# EAGLE board STC31 Breakout-Panel (EAGLE 9.6.2), part 1 of 4
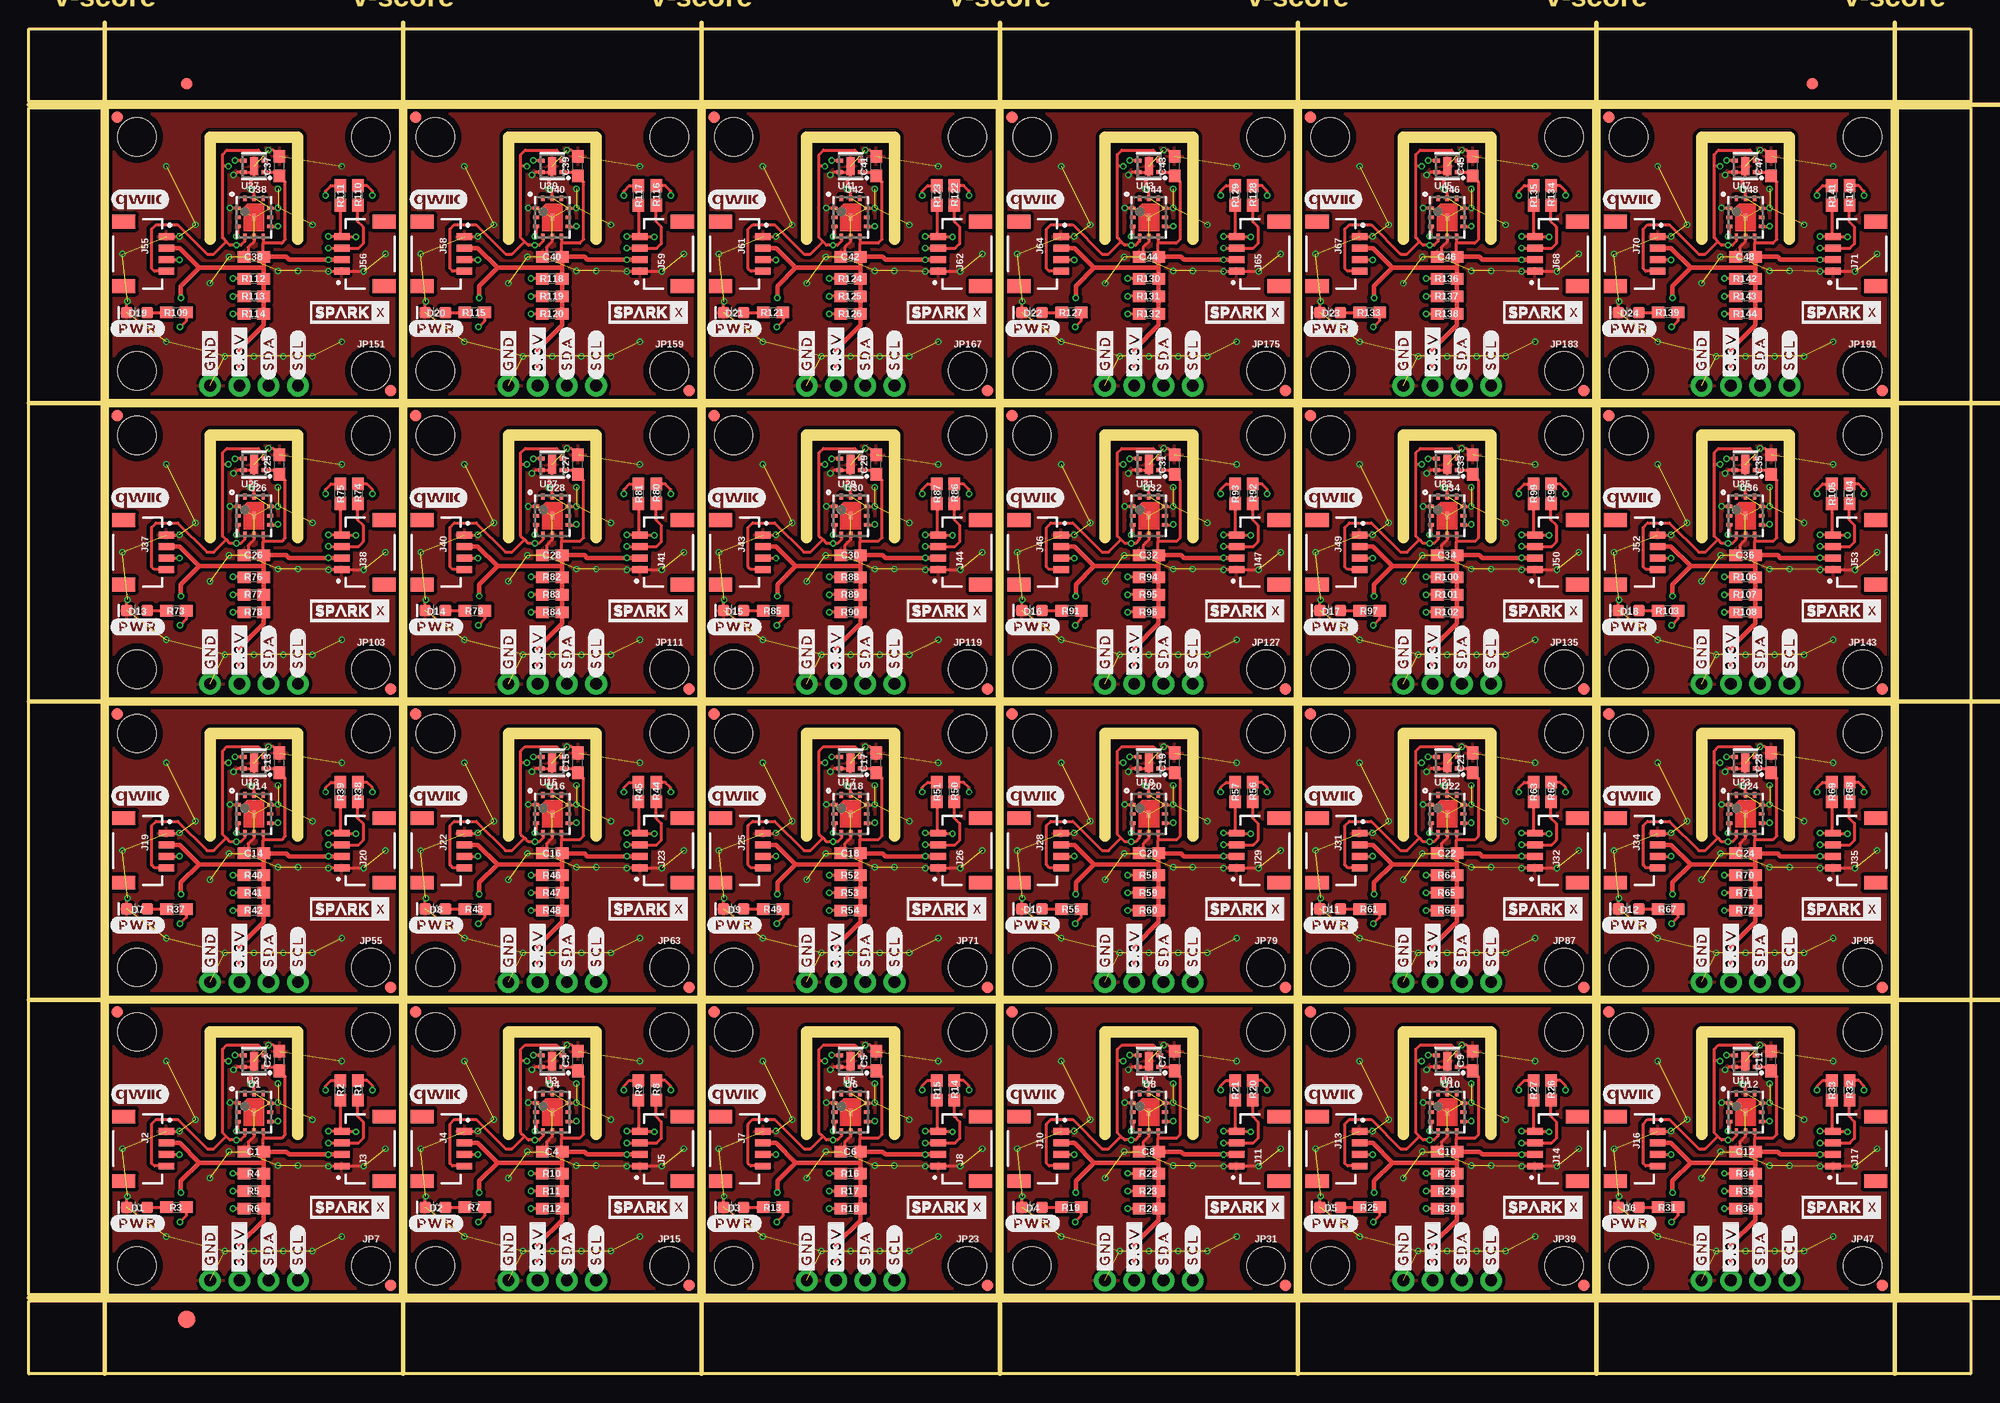
[diagram p0: board, top side]
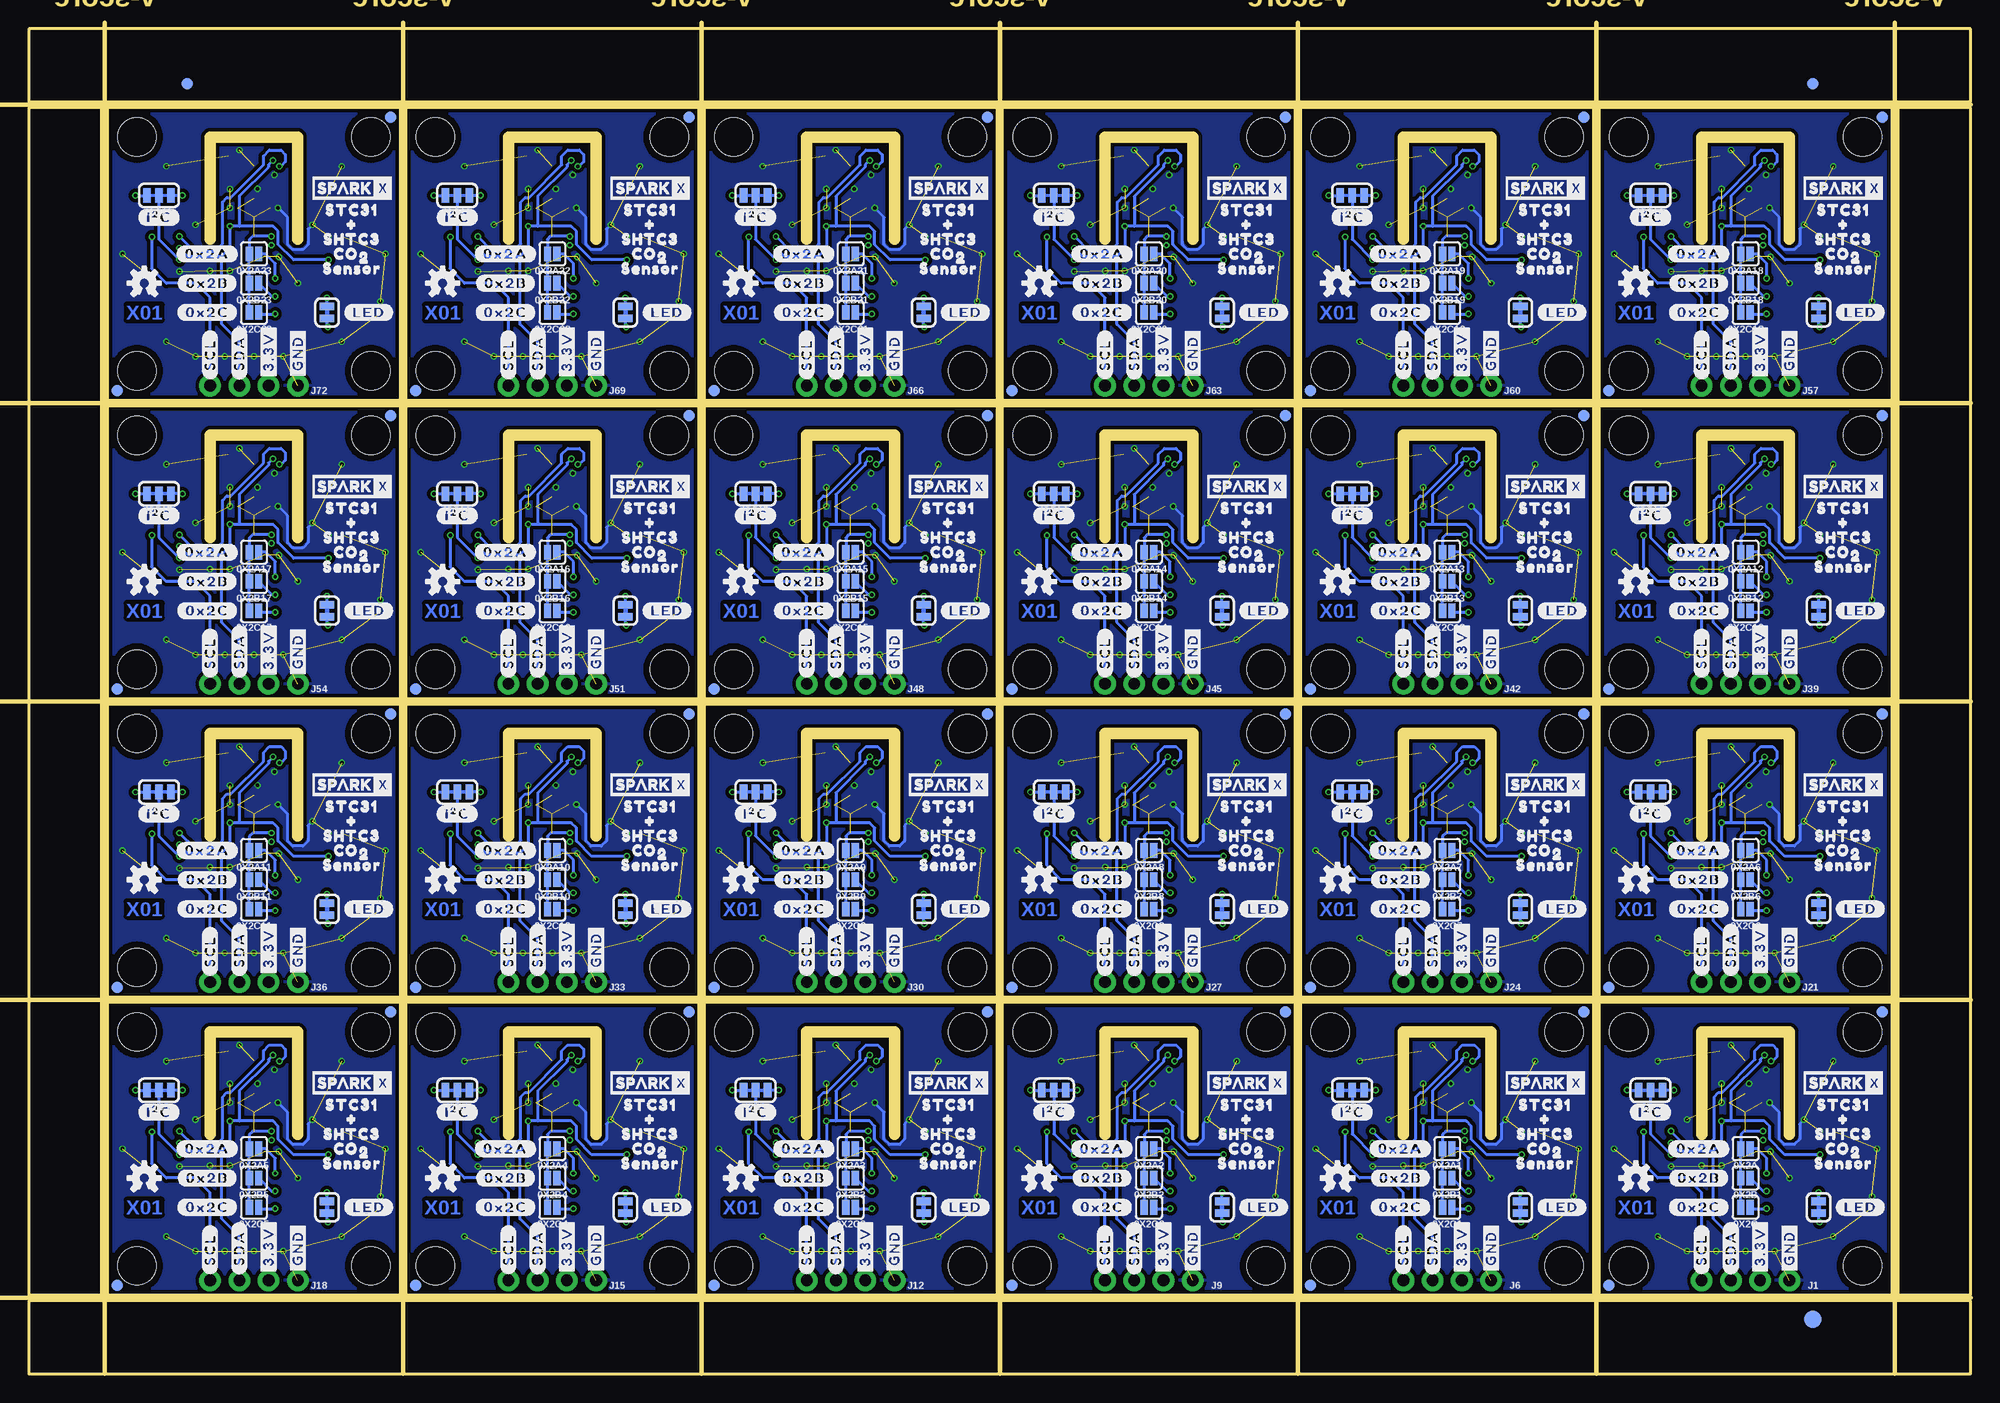
[diagram p1: board, bottom side, seen from below]

Size 168.66 x 116.84 mm. Coordinates in mm from the lower left corner, seen from the top.
Outline: 6.86,6.86 6.86,32.26 32.26,32.26 32.26,6.86 6.86,6.86
Outline: 32.77,6.86 32.77,32.26 58.17,32.26 58.17,6.86 32.77,6.86
Outline: 58.67,6.86 58.67,32.26 84.07,32.26 84.07,6.86 58.67,6.86
Outline: 84.58,6.86 84.58,32.26 109.98,32.26 109.98,6.86 84.58,6.86
Outline: 110.49,6.86 110.49,32.26 135.89,32.26 135.89,6.86 110.49,6.86
Outline: 136.4,6.86 136.4,32.26 161.8,32.26 161.8,6.86 136.4,6.86
Outline: 6.86,32.77 6.86,58.17 32.26,58.17 32.26,32.77 6.86,32.77
Outline: 32.77,32.77 32.77,58.17 58.17,58.17 58.17,32.77 32.77,32.77
Outline: 58.67,32.77 58.67,58.17 84.07,58.17 84.07,32.77 58.67,32.77
Outline: 84.58,32.77 84.58,58.17 109.98,58.17 109.98,32.77 84.58,32.77
Outline: 110.49,32.77 110.49,58.17 135.89,58.17 135.89,32.77 110.49,32.77
Outline: 136.4,32.77 136.4,58.17 161.8,58.17 161.8,32.77 136.4,32.77
Outline: 6.86,58.67 6.86,84.07 32.26,84.07 32.26,58.67 6.86,58.67
Outline: 32.77,58.67 32.77,84.07 58.17,84.07 58.17,58.67 32.77,58.67
Outline: 58.67,58.67 58.67,84.07 84.07,84.07 84.07,58.67 58.67,58.67
Outline: 84.58,58.67 84.58,84.07 109.98,84.07 109.98,58.67 84.58,58.67
Outline: 110.49,58.67 110.49,84.07 135.89,84.07 135.89,58.67 110.49,58.67
Outline: 136.4,58.67 136.4,84.07 161.8,84.07 161.8,58.67 136.4,58.67
Outline: 6.86,84.58 6.86,109.98 32.26,109.98 32.26,84.58 6.86,84.58
Outline: 32.77,84.58 32.77,109.98 58.17,109.98 58.17,84.58 32.77,84.58
Outline: 58.67,84.58 58.67,109.98 84.07,109.98 84.07,84.58 58.67,84.58
Outline: 84.58,84.58 84.58,109.98 109.98,109.98 109.98,84.58 84.58,84.58
Outline: 110.49,84.58 110.49,109.98 135.89,109.98 135.89,84.58 110.49,84.58
Outline: 136.4,84.58 136.4,109.98 161.8,109.98 161.8,84.58 136.4,84.58
Outline: 0,6.35 168.66,6.35 168.66,0 0,0 0,6.35
Outline: 162.31,109.98 168.66,109.98 168.66,6.86 162.31,6.86 162.31,109.98
Outline: 0,116.84 168.66,116.84 168.66,110.49 0,110.49 0,116.84
Outline: 0,109.98 6.35,109.98 6.35,6.86 0,6.86 0,109.98
Copper layers (1*16): Top 0.035mm / dielectric 1.5mm / Bottom 0.035mm
Design rules "STC31 Breakout": minimum track width 5mil, minimum drill 0.3mm, track to track 5mil, track to pad 5mil, pad to pad 5mil, via to via 5mil, smd to smd 5mil, copper to edge 7mil, drill to drill 7mil, minimum pad ring 5mil, minimum via ring 5mil, stop-mask expansion 2.5mil, vias tented up to drill 25mil, thermal gap 10mil
tRestrict: 72 lines
bRestrict: 72 lines
Milling: 84 lines

## Footprints (pad centres in the part's own frame; a part is rotated, then mirrored left to right if it is on the bottom)
SMT-JUMPER_2_NO_SILK = smd 0.635 x 1.27: 1 -0.406,0; 2 0.406,0
0603 = smd 1.1 x 1: 1 -0.85,0; 2 0.85,0
LED-0603 = smd 1 x 1: A -0.877,0; C 0.877,0
FIDUCIAL-1X2 = smd 1 x 1: 1 0,0
FIDUCIAL-1.5X3 = smd 1.5 x 1.5: 1 0,0
SMT-JUMPER_3_2-NC_TRACE_SILK = smd 0.66 x 1.27: 1 -1.041,0; 2 0,0; 3 1.041,0
1X04_NO_SILK = drill 1.016 pad 1.88: 1 0,0; 2 2.54,0; 3 5.08,0; 4 7.62,0
JST04_1MM_RA = smd 0.6 x 1.35: 1 -1.5,0; 2 -0.5,0; 3 0.5,0; 4 1.5,0 | smd 1.2 x 2: NC1 2.8,-3.675; NC2 -2.8,-3.675
STAND-OFF = hole 3.302: 0,0
SMT-JUMPER_2_NC_TRACE_SILK = smd 0.66 x 1.27: 1 -0.521,0; 2 0.521,0
STC31 = smd 0.5 x 0.3: 1 -1.4,0.8; 2 -1.4,0; 3 -1.4,-0.8; 7 1.4,-0.8; 8 1.4,0; 9 1.4,0.8 | smd 0.3 x 0.5: 4 -0.8,-1.65; 5 0,-1.65; 6 0.8,-1.65; 10 0.8,1.65; 11 0,1.65; 12 -0.8,1.65 | smd 0.305 x 0.61: DIEPAD 0,0
SHTC3 = smd 0.55 x 0.35: 1 -0.925,0.5; 2 -0.925,-0.5; 3 0.925,-0.5; 4 0.925,0.5 | smd 0.7 x 1.6: 5 0,0

## Placement (x,y rotation side)
0X2A  JUMPER-SMT_2_NO_SILK  [SMT-JUMPER_2_NO_SILK]  19.56,19.56 180 bottom
0X2A1  JUMPER-SMT_2_NO_SILK  [SMT-JUMPER_2_NO_SILK]  45.47,19.56 180 bottom
0X2A2  JUMPER-SMT_2_NO_SILK  [SMT-JUMPER_2_NO_SILK]  71.37,19.56 180 bottom
0X2A3  JUMPER-SMT_2_NO_SILK  [SMT-JUMPER_2_NO_SILK]  97.28,19.56 180 bottom
0X2A4  JUMPER-SMT_2_NO_SILK  [SMT-JUMPER_2_NO_SILK]  123.19,19.56 180 bottom
0X2A5  JUMPER-SMT_2_NO_SILK  [SMT-JUMPER_2_NO_SILK]  149.1,19.56 180 bottom
0X2A6  JUMPER-SMT_2_NO_SILK  [SMT-JUMPER_2_NO_SILK]  19.56,45.47 180 bottom
0X2A7  JUMPER-SMT_2_NO_SILK  [SMT-JUMPER_2_NO_SILK]  45.47,45.47 180 bottom
0X2A8  JUMPER-SMT_2_NO_SILK  [SMT-JUMPER_2_NO_SILK]  71.37,45.47 180 bottom
0X2A9  JUMPER-SMT_2_NO_SILK  [SMT-JUMPER_2_NO_SILK]  97.28,45.47 180 bottom
0X2A10  JUMPER-SMT_2_NO_SILK  [SMT-JUMPER_2_NO_SILK]  123.19,45.47 180 bottom
0X2A11  JUMPER-SMT_2_NO_SILK  [SMT-JUMPER_2_NO_SILK]  149.1,45.47 180 bottom
0X2A12  JUMPER-SMT_2_NO_SILK  [SMT-JUMPER_2_NO_SILK]  19.56,71.37 180 bottom
0X2A13  JUMPER-SMT_2_NO_SILK  [SMT-JUMPER_2_NO_SILK]  45.47,71.37 180 bottom
0X2A14  JUMPER-SMT_2_NO_SILK  [SMT-JUMPER_2_NO_SILK]  71.37,71.37 180 bottom
0X2A15  JUMPER-SMT_2_NO_SILK  [SMT-JUMPER_2_NO_SILK]  97.28,71.37 180 bottom
0X2A16  JUMPER-SMT_2_NO_SILK  [SMT-JUMPER_2_NO_SILK]  123.19,71.37 180 bottom
0X2A17  JUMPER-SMT_2_NO_SILK  [SMT-JUMPER_2_NO_SILK]  149.1,71.37 180 bottom
0X2A18  JUMPER-SMT_2_NO_SILK  [SMT-JUMPER_2_NO_SILK]  19.56,97.28 180 bottom
0X2A19  JUMPER-SMT_2_NO_SILK  [SMT-JUMPER_2_NO_SILK]  45.47,97.28 180 bottom
0X2A20  JUMPER-SMT_2_NO_SILK  [SMT-JUMPER_2_NO_SILK]  71.37,97.28 180 bottom
0X2A21  JUMPER-SMT_2_NO_SILK  [SMT-JUMPER_2_NO_SILK]  97.28,97.28 180 bottom
0X2A22  JUMPER-SMT_2_NO_SILK  [SMT-JUMPER_2_NO_SILK]  123.19,97.28 180 bottom
0X2A23  JUMPER-SMT_2_NO_SILK  [SMT-JUMPER_2_NO_SILK]  149.1,97.28 180 bottom
0X2B  JUMPER-SMT_2_NO_SILK  [SMT-JUMPER_2_NO_SILK]  19.56,17.02 180 bottom
0X2B1  JUMPER-SMT_2_NO_SILK  [SMT-JUMPER_2_NO_SILK]  45.47,17.02 180 bottom
0X2B2  JUMPER-SMT_2_NO_SILK  [SMT-JUMPER_2_NO_SILK]  71.37,17.02 180 bottom
0X2B3  JUMPER-SMT_2_NO_SILK  [SMT-JUMPER_2_NO_SILK]  97.28,17.02 180 bottom
0X2B4  JUMPER-SMT_2_NO_SILK  [SMT-JUMPER_2_NO_SILK]  123.19,17.02 180 bottom
0X2B5  JUMPER-SMT_2_NO_SILK  [SMT-JUMPER_2_NO_SILK]  149.1,17.02 180 bottom
0X2B6  JUMPER-SMT_2_NO_SILK  [SMT-JUMPER_2_NO_SILK]  19.56,42.93 180 bottom
0X2B7  JUMPER-SMT_2_NO_SILK  [SMT-JUMPER_2_NO_SILK]  45.47,42.93 180 bottom
0X2B8  JUMPER-SMT_2_NO_SILK  [SMT-JUMPER_2_NO_SILK]  71.37,42.93 180 bottom
0X2B9  JUMPER-SMT_2_NO_SILK  [SMT-JUMPER_2_NO_SILK]  97.28,42.93 180 bottom
0X2B10  JUMPER-SMT_2_NO_SILK  [SMT-JUMPER_2_NO_SILK]  123.19,42.93 180 bottom
0X2B11  JUMPER-SMT_2_NO_SILK  [SMT-JUMPER_2_NO_SILK]  149.1,42.93 180 bottom
0X2B12  JUMPER-SMT_2_NO_SILK  [SMT-JUMPER_2_NO_SILK]  19.56,68.83 180 bottom
0X2B13  JUMPER-SMT_2_NO_SILK  [SMT-JUMPER_2_NO_SILK]  45.47,68.83 180 bottom
0X2B14  JUMPER-SMT_2_NO_SILK  [SMT-JUMPER_2_NO_SILK]  71.37,68.83 180 bottom
0X2B15  JUMPER-SMT_2_NO_SILK  [SMT-JUMPER_2_NO_SILK]  97.28,68.83 180 bottom
0X2B16  JUMPER-SMT_2_NO_SILK  [SMT-JUMPER_2_NO_SILK]  123.19,68.83 180 bottom
0X2B17  JUMPER-SMT_2_NO_SILK  [SMT-JUMPER_2_NO_SILK]  149.1,68.83 180 bottom
0X2B18  JUMPER-SMT_2_NO_SILK  [SMT-JUMPER_2_NO_SILK]  19.56,94.74 180 bottom
0X2B19  JUMPER-SMT_2_NO_SILK  [SMT-JUMPER_2_NO_SILK]  45.47,94.74 180 bottom
0X2B20  JUMPER-SMT_2_NO_SILK  [SMT-JUMPER_2_NO_SILK]  71.37,94.74 180 bottom
0X2B21  JUMPER-SMT_2_NO_SILK  [SMT-JUMPER_2_NO_SILK]  97.28,94.74 180 bottom
0X2B22  JUMPER-SMT_2_NO_SILK  [SMT-JUMPER_2_NO_SILK]  123.19,94.74 180 bottom
0X2B23  JUMPER-SMT_2_NO_SILK  [SMT-JUMPER_2_NO_SILK]  149.1,94.74 180 bottom
0X2C  JUMPER-SMT_2_NO_SILK  [SMT-JUMPER_2_NO_SILK]  19.56,14.48 180 bottom
0X2C1  JUMPER-SMT_2_NO_SILK  [SMT-JUMPER_2_NO_SILK]  45.47,14.48 180 bottom
0X2C2  JUMPER-SMT_2_NO_SILK  [SMT-JUMPER_2_NO_SILK]  71.37,14.48 180 bottom
0X2C3  JUMPER-SMT_2_NO_SILK  [SMT-JUMPER_2_NO_SILK]  97.28,14.48 180 bottom
0X2C4  JUMPER-SMT_2_NO_SILK  [SMT-JUMPER_2_NO_SILK]  123.19,14.48 180 bottom
0X2C5  JUMPER-SMT_2_NO_SILK  [SMT-JUMPER_2_NO_SILK]  149.1,14.48 180 bottom
0X2C6  JUMPER-SMT_2_NO_SILK  [SMT-JUMPER_2_NO_SILK]  19.56,40.39 180 bottom
0X2C7  JUMPER-SMT_2_NO_SILK  [SMT-JUMPER_2_NO_SILK]  45.47,40.39 180 bottom
0X2C8  JUMPER-SMT_2_NO_SILK  [SMT-JUMPER_2_NO_SILK]  71.37,40.39 180 bottom
0X2C9  JUMPER-SMT_2_NO_SILK  [SMT-JUMPER_2_NO_SILK]  97.28,40.39 180 bottom
0X2C10  JUMPER-SMT_2_NO_SILK  [SMT-JUMPER_2_NO_SILK]  123.19,40.39 180 bottom
0X2C11  JUMPER-SMT_2_NO_SILK  [SMT-JUMPER_2_NO_SILK]  149.1,40.39 180 bottom
0X2C12  JUMPER-SMT_2_NO_SILK  [SMT-JUMPER_2_NO_SILK]  19.56,66.29 180 bottom
0X2C13  JUMPER-SMT_2_NO_SILK  [SMT-JUMPER_2_NO_SILK]  45.47,66.29 180 bottom
0X2C14  JUMPER-SMT_2_NO_SILK  [SMT-JUMPER_2_NO_SILK]  71.37,66.29 180 bottom
0X2C15  JUMPER-SMT_2_NO_SILK  [SMT-JUMPER_2_NO_SILK]  97.28,66.29 180 bottom
0X2C16  JUMPER-SMT_2_NO_SILK  [SMT-JUMPER_2_NO_SILK]  123.19,66.29 180 bottom
0X2C17  JUMPER-SMT_2_NO_SILK  [SMT-JUMPER_2_NO_SILK]  149.1,66.29 180 bottom
0X2C18  JUMPER-SMT_2_NO_SILK  [SMT-JUMPER_2_NO_SILK]  19.56,92.2 180 bottom
0X2C19  JUMPER-SMT_2_NO_SILK  [SMT-JUMPER_2_NO_SILK]  45.47,92.2 180 bottom
0X2C20  JUMPER-SMT_2_NO_SILK  [SMT-JUMPER_2_NO_SILK]  71.37,92.2 180 bottom
0X2C21  JUMPER-SMT_2_NO_SILK  [SMT-JUMPER_2_NO_SILK]  97.28,92.2 180 bottom
0X2C22  JUMPER-SMT_2_NO_SILK  [SMT-JUMPER_2_NO_SILK]  123.19,92.2 180 bottom
0X2C23  JUMPER-SMT_2_NO_SILK  [SMT-JUMPER_2_NO_SILK]  149.1,92.2 180 bottom
C1  0.1uF  [0603]  19.56,19.3 180 top
C2  0.1uF  [0603]  21.78,27.18 90 top
C3  0.1uF  [0603]  47.69,27.18 90 top
C4  0.1uF  [0603]  45.47,19.3 180 top
C5  0.1uF  [0603]  73.6,27.18 90 top
C6  0.1uF  [0603]  71.37,19.3 180 top
C7  0.1uF  [0603]  99.5,27.18 90 top
C8  0.1uF  [0603]  97.28,19.3 180 top
C9  0.1uF  [0603]  125.41,27.18 90 top
C10  0.1uF  [0603]  123.19,19.3 180 top
C11  0.1uF  [0603]  151.32,27.18 90 top
C12  0.1uF  [0603]  149.1,19.3 180 top
C13  0.1uF  [0603]  21.78,53.09 90 top
C14  0.1uF  [0603]  19.56,45.21 180 top
C15  0.1uF  [0603]  47.69,53.09 90 top
C16  0.1uF  [0603]  45.47,45.21 180 top
C17  0.1uF  [0603]  73.6,53.09 90 top
C18  0.1uF  [0603]  71.37,45.21 180 top
C19  0.1uF  [0603]  99.5,53.09 90 top
C20  0.1uF  [0603]  97.28,45.21 180 top
C21  0.1uF  [0603]  125.41,53.09 90 top
C22  0.1uF  [0603]  123.19,45.21 180 top
C23  0.1uF  [0603]  151.32,53.09 90 top
C24  0.1uF  [0603]  149.1,45.21 180 top
C25  0.1uF  [0603]  21.78,78.99 90 top
C26  0.1uF  [0603]  19.56,71.12 180 top
C27  0.1uF  [0603]  47.69,78.99 90 top
C28  0.1uF  [0603]  45.47,71.12 180 top
C29  0.1uF  [0603]  73.6,78.99 90 top
C30  0.1uF  [0603]  71.37,71.12 180 top
C31  0.1uF  [0603]  99.5,78.99 90 top
C32  0.1uF  [0603]  97.28,71.12 180 top
C33  0.1uF  [0603]  125.41,78.99 90 top
C34  0.1uF  [0603]  123.19,71.12 180 top
C35  0.1uF  [0603]  151.32,78.99 90 top
C36  0.1uF  [0603]  149.1,71.12 180 top
C37  0.1uF  [0603]  21.78,104.9 90 top
C38  0.1uF  [0603]  19.56,97.03 180 top
C39  0.1uF  [0603]  47.69,104.9 90 top
C40  0.1uF  [0603]  45.47,97.03 180 top
C41  0.1uF  [0603]  73.6,104.9 90 top
C42  0.1uF  [0603]  71.37,97.03 180 top
C43  0.1uF  [0603]  99.5,104.9 90 top
C44  0.1uF  [0603]  97.28,97.03 180 top
C45  0.1uF  [0603]  125.41,104.9 90 top
C46  0.1uF  [0603]  123.19,97.03 180 top
C47  0.1uF  [0603]  151.32,104.9 90 top
C48  0.1uF  [0603]  149.1,97.03 180 top
D1  RED  [LED-0603]  9.4,14.48 180 top
D2  RED  [LED-0603]  35.31,14.48 180 top
D3  RED  [LED-0603]  61.21,14.48 180 top
D4  RED  [LED-0603]  87.12,14.48 180 top
D5  RED  [LED-0603]  113.03,14.48 180 top
D6  RED  [LED-0603]  138.94,14.48 180 top
D7  RED  [LED-0603]  9.4,40.39 180 top
D8  RED  [LED-0603]  35.31,40.39 180 top
D9  RED  [LED-0603]  61.21,40.39 180 top
D10  RED  [LED-0603]  87.12,40.39 180 top
D11  RED  [LED-0603]  113.03,40.39 180 top
D12  RED  [LED-0603]  138.94,40.39 180 top
D13  RED  [LED-0603]  9.4,66.29 180 top
D14  RED  [LED-0603]  35.31,66.29 180 top
D15  RED  [LED-0603]  61.21,66.29 180 top
D16  RED  [LED-0603]  87.12,66.29 180 top
D17  RED  [LED-0603]  113.03,66.29 180 top
D18  RED  [LED-0603]  138.94,66.29 180 top
D19  RED  [LED-0603]  9.4,92.2 180 top
D20  RED  [LED-0603]  35.31,92.2 180 top
D21  RED  [LED-0603]  61.21,92.2 180 top
D22  RED  [LED-0603]  87.12,92.2 180 top
D23  RED  [LED-0603]  113.03,92.2 180 top
D24  RED  [LED-0603]  138.94,92.2 180 top
E$1  [FIDUCIAL-1X2]  13.72,112.08 0 top
E$2  [FIDUCIAL-1X2]  13.72,112.08 0 bottom
E$3  [FIDUCIAL-1X2]  154.88,112.08 0 top
E$4  [FIDUCIAL-1X2]  154.88,112.08 0 bottom
E$5  [FIDUCIAL-1.5X3]  13.72,4.76 0 top
E$6  [FIDUCIAL-1.5X3]  13.72,4.76 0 bottom
I2C  JUMPER-SMT_3_2-NC_TRACE_SILK  [SMT-JUMPER_3_2-NC_TRACE_SILK]  27.81,24.64 180 bottom
I2C1  JUMPER-SMT_3_2-NC_TRACE_SILK  [SMT-JUMPER_3_2-NC_TRACE_SILK]  53.72,24.64 180 bottom
I2C2  JUMPER-SMT_3_2-NC_TRACE_SILK  [SMT-JUMPER_3_2-NC_TRACE_SILK]  79.63,24.64 180 bottom
I2C3  JUMPER-SMT_3_2-NC_TRACE_SILK  [SMT-JUMPER_3_2-NC_TRACE_SILK]  105.54,24.64 180 bottom
I2C4  JUMPER-SMT_3_2-NC_TRACE_SILK  [SMT-JUMPER_3_2-NC_TRACE_SILK]  131.44,24.64 180 bottom
I2C5  JUMPER-SMT_3_2-NC_TRACE_SILK  [SMT-JUMPER_3_2-NC_TRACE_SILK]  157.35,24.64 180 bottom
I2C6  JUMPER-SMT_3_2-NC_TRACE_SILK  [SMT-JUMPER_3_2-NC_TRACE_SILK]  27.81,50.55 180 bottom
I2C7  JUMPER-SMT_3_2-NC_TRACE_SILK  [SMT-JUMPER_3_2-NC_TRACE_SILK]  53.72,50.55 180 bottom
I2C8  JUMPER-SMT_3_2-NC_TRACE_SILK  [SMT-JUMPER_3_2-NC_TRACE_SILK]  79.63,50.55 180 bottom
I2C9  JUMPER-SMT_3_2-NC_TRACE_SILK  [SMT-JUMPER_3_2-NC_TRACE_SILK]  105.54,50.55 180 bottom
I2C10  JUMPER-SMT_3_2-NC_TRACE_SILK  [SMT-JUMPER_3_2-NC_TRACE_SILK]  131.44,50.55 180 bottom
I2C11  JUMPER-SMT_3_2-NC_TRACE_SILK  [SMT-JUMPER_3_2-NC_TRACE_SILK]  157.35,50.55 180 bottom
I2C12  JUMPER-SMT_3_2-NC_TRACE_SILK  [SMT-JUMPER_3_2-NC_TRACE_SILK]  27.81,76.45 180 bottom
I2C13  JUMPER-SMT_3_2-NC_TRACE_SILK  [SMT-JUMPER_3_2-NC_TRACE_SILK]  53.72,76.45 180 bottom
I2C14  JUMPER-SMT_3_2-NC_TRACE_SILK  [SMT-JUMPER_3_2-NC_TRACE_SILK]  79.63,76.45 180 bottom
I2C15  JUMPER-SMT_3_2-NC_TRACE_SILK  [SMT-JUMPER_3_2-NC_TRACE_SILK]  105.54,76.45 180 bottom
I2C16  JUMPER-SMT_3_2-NC_TRACE_SILK  [SMT-JUMPER_3_2-NC_TRACE_SILK]  131.44,76.45 180 bottom
I2C17  JUMPER-SMT_3_2-NC_TRACE_SILK  [SMT-JUMPER_3_2-NC_TRACE_SILK]  157.35,76.45 180 bottom
I2C18  JUMPER-SMT_3_2-NC_TRACE_SILK  [SMT-JUMPER_3_2-NC_TRACE_SILK]  27.81,102.36 180 bottom
I2C19  JUMPER-SMT_3_2-NC_TRACE_SILK  [SMT-JUMPER_3_2-NC_TRACE_SILK]  53.72,102.36 180 bottom
I2C20  JUMPER-SMT_3_2-NC_TRACE_SILK  [SMT-JUMPER_3_2-NC_TRACE_SILK]  79.63,102.36 180 bottom
I2C21  JUMPER-SMT_3_2-NC_TRACE_SILK  [SMT-JUMPER_3_2-NC_TRACE_SILK]  105.54,102.36 180 bottom
I2C22  JUMPER-SMT_3_2-NC_TRACE_SILK  [SMT-JUMPER_3_2-NC_TRACE_SILK]  131.44,102.36 180 bottom
I2C23  JUMPER-SMT_3_2-NC_TRACE_SILK  [SMT-JUMPER_3_2-NC_TRACE_SILK]  157.35,102.36 180 bottom
J1  [1X04_NO_SILK]  15.75,8.13 180 bottom
J2  QWIIC_RIGHT_ANGLE  [JST04_1MM_RA]  11.94,19.56 270 top
J3  QWIIC_RIGHT_ANGLE  [JST04_1MM_RA]  27.18,19.56 90 top
J4  QWIIC_RIGHT_ANGLE  [JST04_1MM_RA]  37.85,19.56 270 top
J5  QWIIC_RIGHT_ANGLE  [JST04_1MM_RA]  53.09,19.56 90 top
J6  [1X04_NO_SILK]  41.66,8.13 180 bottom
J7  QWIIC_RIGHT_ANGLE  [JST04_1MM_RA]  63.75,19.56 270 top
J8  QWIIC_RIGHT_ANGLE  [JST04_1MM_RA]  78.99,19.56 90 top
J9  [1X04_NO_SILK]  67.56,8.13 180 bottom
J10  QWIIC_RIGHT_ANGLE  [JST04_1MM_RA]  89.66,19.56 270 top
J11  QWIIC_RIGHT_ANGLE  [JST04_1MM_RA]  104.9,19.56 90 top
J12  [1X04_NO_SILK]  93.47,8.13 180 bottom
J13  QWIIC_RIGHT_ANGLE  [JST04_1MM_RA]  115.57,19.56 270 top
J14  QWIIC_RIGHT_ANGLE  [JST04_1MM_RA]  130.81,19.56 90 top
J15  [1X04_NO_SILK]  119.38,8.13 180 bottom
J16  QWIIC_RIGHT_ANGLE  [JST04_1MM_RA]  141.48,19.56 270 top
J17  QWIIC_RIGHT_ANGLE  [JST04_1MM_RA]  156.72,19.56 90 top
J18  [1X04_NO_SILK]  145.29,8.13 180 bottom
J19  QWIIC_RIGHT_ANGLE  [JST04_1MM_RA]  11.94,45.47 270 top
J20  QWIIC_RIGHT_ANGLE  [JST04_1MM_RA]  27.18,45.47 90 top
J21  [1X04_NO_SILK]  15.75,34.04 180 bottom
J22  QWIIC_RIGHT_ANGLE  [JST04_1MM_RA]  37.85,45.47 270 top
J23  QWIIC_RIGHT_ANGLE  [JST04_1MM_RA]  53.09,45.47 90 top
J24  [1X04_NO_SILK]  41.66,34.04 180 bottom
J25  QWIIC_RIGHT_ANGLE  [JST04_1MM_RA]  63.75,45.47 270 top
J26  QWIIC_RIGHT_ANGLE  [JST04_1MM_RA]  78.99,45.47 90 top
J27  [1X04_NO_SILK]  67.56,34.04 180 bottom
J28  QWIIC_RIGHT_ANGLE  [JST04_1MM_RA]  89.66,45.47 270 top
J29  QWIIC_RIGHT_ANGLE  [JST04_1MM_RA]  104.9,45.47 90 top
J30  [1X04_NO_SILK]  93.47,34.04 180 bottom
J31  QWIIC_RIGHT_ANGLE  [JST04_1MM_RA]  115.57,45.47 270 top
J32  QWIIC_RIGHT_ANGLE  [JST04_1MM_RA]  130.81,45.47 90 top
J33  [1X04_NO_SILK]  119.38,34.04 180 bottom
J34  QWIIC_RIGHT_ANGLE  [JST04_1MM_RA]  141.48,45.47 270 top
J35  QWIIC_RIGHT_ANGLE  [JST04_1MM_RA]  156.72,45.47 90 top
J36  [1X04_NO_SILK]  145.29,34.04 180 bottom
J37  QWIIC_RIGHT_ANGLE  [JST04_1MM_RA]  11.94,71.37 270 top
J38  QWIIC_RIGHT_ANGLE  [JST04_1MM_RA]  27.18,71.37 90 top
J39  [1X04_NO_SILK]  15.75,59.94 180 bottom
J40  QWIIC_RIGHT_ANGLE  [JST04_1MM_RA]  37.85,71.37 270 top
J41  QWIIC_RIGHT_ANGLE  [JST04_1MM_RA]  53.09,71.37 90 top
J42  [1X04_NO_SILK]  41.66,59.94 180 bottom
J43  QWIIC_RIGHT_ANGLE  [JST04_1MM_RA]  63.75,71.37 270 top
J44  QWIIC_RIGHT_ANGLE  [JST04_1MM_RA]  78.99,71.37 90 top
J45  [1X04_NO_SILK]  67.56,59.94 180 bottom
J46  QWIIC_RIGHT_ANGLE  [JST04_1MM_RA]  89.66,71.37 270 top
J47  QWIIC_RIGHT_ANGLE  [JST04_1MM_RA]  104.9,71.37 90 top
J48  [1X04_NO_SILK]  93.47,59.94 180 bottom
J49  QWIIC_RIGHT_ANGLE  [JST04_1MM_RA]  115.57,71.37 270 top
J50  QWIIC_RIGHT_ANGLE  [JST04_1MM_RA]  130.81,71.37 90 top
J51  [1X04_NO_SILK]  119.38,59.94 180 bottom
J52  QWIIC_RIGHT_ANGLE  [JST04_1MM_RA]  141.48,71.37 270 top
J53  QWIIC_RIGHT_ANGLE  [JST04_1MM_RA]  156.72,71.37 90 top
J54  [1X04_NO_SILK]  145.29,59.94 180 bottom
J55  QWIIC_RIGHT_ANGLE  [JST04_1MM_RA]  11.94,97.28 270 top
J56  QWIIC_RIGHT_ANGLE  [JST04_1MM_RA]  27.18,97.28 90 top
J57  [1X04_NO_SILK]  15.75,85.85 180 bottom
J58  QWIIC_RIGHT_ANGLE  [JST04_1MM_RA]  37.85,97.28 270 top
J59  QWIIC_RIGHT_ANGLE  [JST04_1MM_RA]  53.09,97.28 90 top
J60  [1X04_NO_SILK]  41.66,85.85 180 bottom
J61  QWIIC_RIGHT_ANGLE  [JST04_1MM_RA]  63.75,97.28 270 top
J62  QWIIC_RIGHT_ANGLE  [JST04_1MM_RA]  78.99,97.28 90 top
J63  [1X04_NO_SILK]  67.56,85.85 180 bottom
J64  QWIIC_RIGHT_ANGLE  [JST04_1MM_RA]  89.66,97.28 270 top
J65  QWIIC_RIGHT_ANGLE  [JST04_1MM_RA]  104.9,97.28 90 top
J66  [1X04_NO_SILK]  93.47,85.85 180 bottom
J67  QWIIC_RIGHT_ANGLE  [JST04_1MM_RA]  115.57,97.28 270 top
J68  QWIIC_RIGHT_ANGLE  [JST04_1MM_RA]  130.81,97.28 90 top
J69  [1X04_NO_SILK]  119.38,85.85 180 bottom
J70  QWIIC_RIGHT_ANGLE  [JST04_1MM_RA]  141.48,97.28 270 top
J71  QWIIC_RIGHT_ANGLE  [JST04_1MM_RA]  156.72,97.28 90 top
J72  [1X04_NO_SILK]  145.29,85.85 180 bottom
JP1  FIDUCIAL1X2  [FIDUCIAL-1X2]  7.68,31.43 0 bottom
JP2  FIDUCIAL1X2  [FIDUCIAL-1X2]  31.43,7.68 0 top
JP3  STAND-OFF  [STAND-OFF]  9.4,29.72 0 top
JP4  STAND-OFF  [STAND-OFF]  29.72,29.72 0 top
JP5  FIDUCIAL1X2  [FIDUCIAL-1X2]  31.43,7.68 0 bottom
JP6  FIDUCIAL1X2  [FIDUCIAL-1X2]  7.68,31.43 0 top
JP7  STAND-OFF  [STAND-OFF]  29.72,9.4 0 top
JP8  STAND-OFF  [STAND-OFF]  9.4,9.4 0 top
JP9  STAND-OFF  [STAND-OFF]  35.31,29.72 0 top
JP10  STAND-OFF  [STAND-OFF]  55.63,29.72 0 top
JP11  FIDUCIAL1X2  [FIDUCIAL-1X2]  57.34,7.68 0 top
JP12  FIDUCIAL1X2  [FIDUCIAL-1X2]  33.59,31.43 0 top
JP13  FIDUCIAL1X2  [FIDUCIAL-1X2]  33.59,31.43 0 bottom
JP14  FIDUCIAL1X2  [FIDUCIAL-1X2]  57.34,7.68 0 bottom
JP15  STAND-OFF  [STAND-OFF]  55.63,9.4 0 top
JP16  STAND-OFF  [STAND-OFF]  35.31,9.4 0 top
JP17  STAND-OFF  [STAND-OFF]  61.21,29.72 0 top
JP18  STAND-OFF  [STAND-OFF]  81.53,29.72 0 top
JP19  FIDUCIAL1X2  [FIDUCIAL-1X2]  83.25,7.68 0 top
JP20  FIDUCIAL1X2  [FIDUCIAL-1X2]  59.5,31.43 0 top
JP21  FIDUCIAL1X2  [FIDUCIAL-1X2]  59.5,31.43 0 bottom
JP22  FIDUCIAL1X2  [FIDUCIAL-1X2]  83.25,7.68 0 bottom
JP23  STAND-OFF  [STAND-OFF]  81.53,9.4 0 top
JP24  STAND-OFF  [STAND-OFF]  61.21,9.4 0 top
JP25  STAND-OFF  [STAND-OFF]  87.12,29.72 0 top
JP26  STAND-OFF  [STAND-OFF]  107.44,29.72 0 top
JP27  FIDUCIAL1X2  [FIDUCIAL-1X2]  109.16,7.68 0 top
JP28  FIDUCIAL1X2  [FIDUCIAL-1X2]  85.41,31.43 0 top
JP29  FIDUCIAL1X2  [FIDUCIAL-1X2]  85.41,31.43 0 bottom
JP30  FIDUCIAL1X2  [FIDUCIAL-1X2]  109.16,7.68 0 bottom
JP31  STAND-OFF  [STAND-OFF]  107.44,9.4 0 top
JP32  STAND-OFF  [STAND-OFF]  87.12,9.4 0 top
JP33  STAND-OFF  [STAND-OFF]  113.03,29.72 0 top
JP34  STAND-OFF  [STAND-OFF]  133.35,29.72 0 top
JP35  FIDUCIAL1X2  [FIDUCIAL-1X2]  135.06,7.68 0 top
JP36  FIDUCIAL1X2  [FIDUCIAL-1X2]  111.32,31.43 0 top
JP37  FIDUCIAL1X2  [FIDUCIAL-1X2]  111.32,31.43 0 bottom
JP38  FIDUCIAL1X2  [FIDUCIAL-1X2]  135.06,7.68 0 bottom
JP39  STAND-OFF  [STAND-OFF]  133.35,9.4 0 top
JP40  STAND-OFF  [STAND-OFF]  113.03,9.4 0 top
JP41  STAND-OFF  [STAND-OFF]  138.94,29.72 0 top
JP42  STAND-OFF  [STAND-OFF]  159.26,29.72 0 top
JP43  FIDUCIAL1X2  [FIDUCIAL-1X2]  160.97,7.68 0 top
JP44  FIDUCIAL1X2  [FIDUCIAL-1X2]  137.22,31.43 0 top
JP45  FIDUCIAL1X2  [FIDUCIAL-1X2]  137.22,31.43 0 bottom
JP46  FIDUCIAL1X2  [FIDUCIAL-1X2]  160.97,7.68 0 bottom
JP47  STAND-OFF  [STAND-OFF]  159.26,9.4 0 top
JP48  STAND-OFF  [STAND-OFF]  138.94,9.4 0 top
JP49  STAND-OFF  [STAND-OFF]  9.4,55.63 0 top
JP50  STAND-OFF  [STAND-OFF]  29.72,55.63 0 top
JP51  FIDUCIAL1X2  [FIDUCIAL-1X2]  31.43,33.59 0 top
JP52  FIDUCIAL1X2  [FIDUCIAL-1X2]  7.68,57.34 0 top
JP53  FIDUCIAL1X2  [FIDUCIAL-1X2]  7.68,57.34 0 bottom
JP54  FIDUCIAL1X2  [FIDUCIAL-1X2]  31.43,33.59 0 bottom
JP55  STAND-OFF  [STAND-OFF]  29.72,35.31 0 top
JP56  STAND-OFF  [STAND-OFF]  9.4,35.31 0 top
JP57  STAND-OFF  [STAND-OFF]  35.31,55.63 0 top
JP58  STAND-OFF  [STAND-OFF]  55.63,55.63 0 top
JP59  FIDUCIAL1X2  [FIDUCIAL-1X2]  57.34,33.59 0 top
JP60  FIDUCIAL1X2  [FIDUCIAL-1X2]  33.59,57.34 0 top
JP61  FIDUCIAL1X2  [FIDUCIAL-1X2]  33.59,57.34 0 bottom
JP62  FIDUCIAL1X2  [FIDUCIAL-1X2]  57.34,33.59 0 bottom
JP63  STAND-OFF  [STAND-OFF]  55.63,35.31 0 top
JP64  STAND-OFF  [STAND-OFF]  35.31,35.31 0 top
JP65  STAND-OFF  [STAND-OFF]  61.21,55.63 0 top
JP66  STAND-OFF  [STAND-OFF]  81.53,55.63 0 top
JP67  FIDUCIAL1X2  [FIDUCIAL-1X2]  83.25,33.59 0 top
JP68  FIDUCIAL1X2  [FIDUCIAL-1X2]  59.5,57.34 0 top
JP69  FIDUCIAL1X2  [FIDUCIAL-1X2]  59.5,57.34 0 bottom
JP70  FIDUCIAL1X2  [FIDUCIAL-1X2]  83.25,33.59 0 bottom
JP71  STAND-OFF  [STAND-OFF]  81.53,35.31 0 top
JP72  STAND-OFF  [STAND-OFF]  61.21,35.31 0 top
JP73  STAND-OFF  [STAND-OFF]  87.12,55.63 0 top
JP74  STAND-OFF  [STAND-OFF]  107.44,55.63 0 top
JP75  FIDUCIAL1X2  [FIDUCIAL-1X2]  109.16,33.59 0 top
JP76  FIDUCIAL1X2  [FIDUCIAL-1X2]  85.41,57.34 0 top
JP77  FIDUCIAL1X2  [FIDUCIAL-1X2]  85.41,57.34 0 bottom
JP78  FIDUCIAL1X2  [FIDUCIAL-1X2]  109.16,33.59 0 bottom
JP79  STAND-OFF  [STAND-OFF]  107.44,35.31 0 top
JP80  STAND-OFF  [STAND-OFF]  87.12,35.31 0 top
JP81  STAND-OFF  [STAND-OFF]  113.03,55.63 0 top
JP82  STAND-OFF  [STAND-OFF]  133.35,55.63 0 top
JP83  FIDUCIAL1X2  [FIDUCIAL-1X2]  135.06,33.59 0 top
JP84  FIDUCIAL1X2  [FIDUCIAL-1X2]  111.32,57.34 0 top
JP85  FIDUCIAL1X2  [FIDUCIAL-1X2]  111.32,57.34 0 bottom
JP86  FIDUCIAL1X2  [FIDUCIAL-1X2]  135.06,33.59 0 bottom
JP87  STAND-OFF  [STAND-OFF]  133.35,35.31 0 top
JP88  STAND-OFF  [STAND-OFF]  113.03,35.31 0 top
JP89  STAND-OFF  [STAND-OFF]  138.94,55.63 0 top
JP90  STAND-OFF  [STAND-OFF]  159.26,55.63 0 top
JP91  FIDUCIAL1X2  [FIDUCIAL-1X2]  160.97,33.59 0 top
JP92  FIDUCIAL1X2  [FIDUCIAL-1X2]  137.22,57.34 0 top
JP93  FIDUCIAL1X2  [FIDUCIAL-1X2]  137.22,57.34 0 bottom
JP94  FIDUCIAL1X2  [FIDUCIAL-1X2]  160.97,33.59 0 bottom
JP95  STAND-OFF  [STAND-OFF]  159.26,35.31 0 top
JP96  STAND-OFF  [STAND-OFF]  138.94,35.31 0 top
JP97  STAND-OFF  [STAND-OFF]  9.4,81.53 0 top
JP98  STAND-OFF  [STAND-OFF]  29.72,81.53 0 top
JP99  FIDUCIAL1X2  [FIDUCIAL-1X2]  31.43,59.5 0 top
JP100  FIDUCIAL1X2  [FIDUCIAL-1X2]  7.68,83.25 0 top
JP101  FIDUCIAL1X2  [FIDUCIAL-1X2]  7.68,83.25 0 bottom
JP102  FIDUCIAL1X2  [FIDUCIAL-1X2]  31.43,59.5 0 bottom
JP103  STAND-OFF  [STAND-OFF]  29.72,61.21 0 top
JP104  STAND-OFF  [STAND-OFF]  9.4,61.21 0 top
JP105  STAND-OFF  [STAND-OFF]  35.31,81.53 0 top
JP106  STAND-OFF  [STAND-OFF]  55.63,81.53 0 top
JP107  FIDUCIAL1X2  [FIDUCIAL-1X2]  57.34,59.5 0 top
JP108  FIDUCIAL1X2  [FIDUCIAL-1X2]  33.59,83.25 0 top
JP109  FIDUCIAL1X2  [FIDUCIAL-1X2]  33.59,83.25 0 bottom
JP110  FIDUCIAL1X2  [FIDUCIAL-1X2]  57.34,59.5 0 bottom
JP111  STAND-OFF  [STAND-OFF]  55.63,61.21 0 top
JP112  STAND-OFF  [STAND-OFF]  35.31,61.21 0 top
JP113  STAND-OFF  [STAND-OFF]  61.21,81.53 0 top
JP114  STAND-OFF  [STAND-OFF]  81.53,81.53 0 top
JP115  FIDUCIAL1X2  [FIDUCIAL-1X2]  83.25,59.5 0 top
JP116  FIDUCIAL1X2  [FIDUCIAL-1X2]  59.5,83.25 0 top
JP117  FIDUCIAL1X2  [FIDUCIAL-1X2]  59.5,83.25 0 bottom
JP118  FIDUCIAL1X2  [FIDUCIAL-1X2]  83.25,59.5 0 bottom
JP119  STAND-OFF  [STAND-OFF]  81.53,61.21 0 top
JP120  STAND-OFF  [STAND-OFF]  61.21,61.21 0 top
JP121  STAND-OFF  [STAND-OFF]  87.12,81.53 0 top
JP122  STAND-OFF  [STAND-OFF]  107.44,81.53 0 top
JP123  FIDUCIAL1X2  [FIDUCIAL-1X2]  109.16,59.5 0 top
JP124  FIDUCIAL1X2  [FIDUCIAL-1X2]  85.41,83.25 0 top
JP125  FIDUCIAL1X2  [FIDUCIAL-1X2]  85.41,83.25 0 bottom
JP126  FIDUCIAL1X2  [FIDUCIAL-1X2]  109.16,59.5 0 bottom
JP127  STAND-OFF  [STAND-OFF]  107.44,61.21 0 top
JP128  STAND-OFF  [STAND-OFF]  87.12,61.21 0 top
JP129  STAND-OFF  [STAND-OFF]  113.03,81.53 0 top
JP130  STAND-OFF  [STAND-OFF]  133.35,81.53 0 top
JP131  FIDUCIAL1X2  [FIDUCIAL-1X2]  135.06,59.5 0 top
JP132  FIDUCIAL1X2  [FIDUCIAL-1X2]  111.32,83.25 0 top
JP133  FIDUCIAL1X2  [FIDUCIAL-1X2]  111.32,83.25 0 bottom
JP134  FIDUCIAL1X2  [FIDUCIAL-1X2]  135.06,59.5 0 bottom
JP135  STAND-OFF  [STAND-OFF]  133.35,61.21 0 top
JP136  STAND-OFF  [STAND-OFF]  113.03,61.21 0 top
JP137  STAND-OFF  [STAND-OFF]  138.94,81.53 0 top
JP138  STAND-OFF  [STAND-OFF]  159.26,81.53 0 top
JP139  FIDUCIAL1X2  [FIDUCIAL-1X2]  160.97,59.5 0 top
JP140  FIDUCIAL1X2  [FIDUCIAL-1X2]  137.22,83.25 0 top
JP141  FIDUCIAL1X2  [FIDUCIAL-1X2]  137.22,83.25 0 bottom
JP142  FIDUCIAL1X2  [FIDUCIAL-1X2]  160.97,59.5 0 bottom
JP143  STAND-OFF  [STAND-OFF]  159.26,61.21 0 top
JP144  STAND-OFF  [STAND-OFF]  138.94,61.21 0 top
JP145  STAND-OFF  [STAND-OFF]  9.4,107.44 0 top
JP146  STAND-OFF  [STAND-OFF]  29.72,107.44 0 top
JP147  FIDUCIAL1X2  [FIDUCIAL-1X2]  31.43,85.41 0 top
JP148  FIDUCIAL1X2  [FIDUCIAL-1X2]  7.68,109.16 0 top
JP149  FIDUCIAL1X2  [FIDUCIAL-1X2]  7.68,109.16 0 bottom
JP150  FIDUCIAL1X2  [FIDUCIAL-1X2]  31.43,85.41 0 bottom
JP151  STAND-OFF  [STAND-OFF]  29.72,87.12 0 top
JP152  STAND-OFF  [STAND-OFF]  9.4,87.12 0 top
JP153  STAND-OFF  [STAND-OFF]  35.31,107.44 0 top
JP154  STAND-OFF  [STAND-OFF]  55.63,107.44 0 top
JP155  FIDUCIAL1X2  [FIDUCIAL-1X2]  57.34,85.41 0 top
JP156  FIDUCIAL1X2  [FIDUCIAL-1X2]  33.59,109.16 0 top
JP157  FIDUCIAL1X2  [FIDUCIAL-1X2]  33.59,109.16 0 bottom
JP158  FIDUCIAL1X2  [FIDUCIAL-1X2]  57.34,85.41 0 bottom
JP159  STAND-OFF  [STAND-OFF]  55.63,87.12 0 top
JP160  STAND-OFF  [STAND-OFF]  35.31,87.12 0 top
JP161  STAND-OFF  [STAND-OFF]  61.21,107.44 0 top
JP162  STAND-OFF  [STAND-OFF]  81.53,107.44 0 top
JP163  FIDUCIAL1X2  [FIDUCIAL-1X2]  83.25,85.41 0 top
JP164  FIDUCIAL1X2  [FIDUCIAL-1X2]  59.5,109.16 0 top
JP165  FIDUCIAL1X2  [FIDUCIAL-1X2]  59.5,109.16 0 bottom
JP166  FIDUCIAL1X2  [FIDUCIAL-1X2]  83.25,85.41 0 bottom
JP167  STAND-OFF  [STAND-OFF]  81.53,87.12 0 top
JP168  STAND-OFF  [STAND-OFF]  61.21,87.12 0 top
JP169  STAND-OFF  [STAND-OFF]  87.12,107.44 0 top
JP170  STAND-OFF  [STAND-OFF]  107.44,107.44 0 top
JP171  FIDUCIAL1X2  [FIDUCIAL-1X2]  109.16,85.41 0 top
JP172  FIDUCIAL1X2  [FIDUCIAL-1X2]  85.41,109.16 0 top
JP173  FIDUCIAL1X2  [FIDUCIAL-1X2]  85.41,109.16 0 bottom
JP174  FIDUCIAL1X2  [FIDUCIAL-1X2]  109.16,85.41 0 bottom
JP175  STAND-OFF  [STAND-OFF]  107.44,87.12 0 top
JP176  STAND-OFF  [STAND-OFF]  87.12,87.12 0 top
JP177  STAND-OFF  [STAND-OFF]  113.03,107.44 0 top
JP178  STAND-OFF  [STAND-OFF]  133.35,107.44 0 top
JP179  FIDUCIAL1X2  [FIDUCIAL-1X2]  135.06,85.41 0 top
JP180  FIDUCIAL1X2  [FIDUCIAL-1X2]  111.32,109.16 0 top
JP181  FIDUCIAL1X2  [FIDUCIAL-1X2]  111.32,109.16 0 bottom
JP182  FIDUCIAL1X2  [FIDUCIAL-1X2]  135.06,85.41 0 bottom
JP183  STAND-OFF  [STAND-OFF]  133.35,87.12 0 top
JP184  STAND-OFF  [STAND-OFF]  113.03,87.12 0 top
JP185  STAND-OFF  [STAND-OFF]  138.94,107.44 0 top
JP186  STAND-OFF  [STAND-OFF]  159.26,107.44 0 top
JP187  FIDUCIAL1X2  [FIDUCIAL-1X2]  160.97,85.41 0 top
JP188  FIDUCIAL1X2  [FIDUCIAL-1X2]  137.22,109.16 0 top
JP189  FIDUCIAL1X2  [FIDUCIAL-1X2]  137.22,109.16 0 bottom
JP190  FIDUCIAL1X2  [FIDUCIAL-1X2]  160.97,85.41 0 bottom
JP191  STAND-OFF  [STAND-OFF]  159.26,87.12 0 top
JP192  STAND-OFF  [STAND-OFF]  138.94,87.12 0 top
LED  JUMPER-SMT_2_NC_TRACE_SILK  [SMT-JUMPER_2_NC_TRACE_SILK]  13.21,14.48 90 bottom
LED1  JUMPER-SMT_2_NC_TRACE_SILK  [SMT-JUMPER_2_NC_TRACE_SILK]  39.12,14.48 90 bottom
LED2  JUMPER-SMT_2_NC_TRACE_SILK  [SMT-JUMPER_2_NC_TRACE_SILK]  65.02,14.48 90 bottom
LED3  JUMPER-SMT_2_NC_TRACE_SILK  [SMT-JUMPER_2_NC_TRACE_SILK]  90.93,14.48 90 bottom
LED4  JUMPER-SMT_2_NC_TRACE_SILK  [SMT-JUMPER_2_NC_TRACE_SILK]  116.84,14.48 90 bottom
LED5  JUMPER-SMT_2_NC_TRACE_SILK  [SMT-JUMPER_2_NC_TRACE_SILK]  142.75,14.48 90 bottom
LED6  JUMPER-SMT_2_NC_TRACE_SILK  [SMT-JUMPER_2_NC_TRACE_SILK]  13.21,40.39 90 bottom
LED7  JUMPER-SMT_2_NC_TRACE_SILK  [SMT-JUMPER_2_NC_TRACE_SILK]  39.12,40.39 90 bottom
LED8  JUMPER-SMT_2_NC_TRACE_SILK  [SMT-JUMPER_2_NC_TRACE_SILK]  65.02,40.39 90 bottom
LED9  JUMPER-SMT_2_NC_TRACE_SILK  [SMT-JUMPER_2_NC_TRACE_SILK]  90.93,40.39 90 bottom
LED10  JUMPER-SMT_2_NC_TRACE_SILK  [SMT-JUMPER_2_NC_TRACE_SILK]  116.84,40.39 90 bottom
LED11  JUMPER-SMT_2_NC_TRACE_SILK  [SMT-JUMPER_2_NC_TRACE_SILK]  142.75,40.39 90 bottom
LED12  JUMPER-SMT_2_NC_TRACE_SILK  [SMT-JUMPER_2_NC_TRACE_SILK]  13.21,66.29 90 bottom
LED13  JUMPER-SMT_2_NC_TRACE_SILK  [SMT-JUMPER_2_NC_TRACE_SILK]  39.12,66.29 90 bottom
LED14  JUMPER-SMT_2_NC_TRACE_SILK  [SMT-JUMPER_2_NC_TRACE_SILK]  65.02,66.29 90 bottom
LED15  JUMPER-SMT_2_NC_TRACE_SILK  [SMT-JUMPER_2_NC_TRACE_SILK]  90.93,66.29 90 bottom
LED16  JUMPER-SMT_2_NC_TRACE_SILK  [SMT-JUMPER_2_NC_TRACE_SILK]  116.84,66.29 90 bottom
LED17  JUMPER-SMT_2_NC_TRACE_SILK  [SMT-JUMPER_2_NC_TRACE_SILK]  142.75,66.29 90 bottom
LED18  JUMPER-SMT_2_NC_TRACE_SILK  [SMT-JUMPER_2_NC_TRACE_SILK]  13.21,92.2 90 bottom
LED19  JUMPER-SMT_2_NC_TRACE_SILK  [SMT-JUMPER_2_NC_TRACE_SILK]  39.12,92.2 90 bottom
LED20  JUMPER-SMT_2_NC_TRACE_SILK  [SMT-JUMPER_2_NC_TRACE_SILK]  65.02,92.2 90 bottom
LED21  JUMPER-SMT_2_NC_TRACE_SILK  [SMT-JUMPER_2_NC_TRACE_SILK]  90.93,92.2 90 bottom
LED22  JUMPER-SMT_2_NC_TRACE_SILK  [SMT-JUMPER_2_NC_TRACE_SILK]  116.84,92.2 90 bottom
LED23  JUMPER-SMT_2_NC_TRACE_SILK  [SMT-JUMPER_2_NC_TRACE_SILK]  142.75,92.2 90 bottom
LOGO1  OSHW-LOGOS  [OSHW-LOGO-S]  54.99,17.02 0 bottom
LOGO2  QWIIC_LOGO_5MM  [QWIIC_5MM]  9.65,24.32 0 top
LOGO3  QWIIC_LOGO_5MM  [QWIIC_5MM]  35.56,24.32 0 top
LOGO4  OSHW-LOGOS  [OSHW-LOGO-S]  80.9,17.02 0 bottom
LOGO5  OSHW-LOGOS  [OSHW-LOGO-S]  29.08,17.02 0 bottom
LOGO6  QWIIC_LOGO_5MM  [QWIIC_5MM]  61.47,24.32 0 top
LOGO7  OSHW-LOGOS  [OSHW-LOGO-S]  106.81,17.02 0 bottom
LOGO8  QWIIC_LOGO_5MM  [QWIIC_5MM]  87.38,24.32 0 top
LOGO9  OSHW-LOGOS  [OSHW-LOGO-S]  132.72,17.02 0 bottom
LOGO10  QWIIC_LOGO_5MM  [QWIIC_5MM]  113.28,24.32 0 top
LOGO11  OSHW-LOGOS  [OSHW-LOGO-S]  158.62,17.02 0 bottom
LOGO12  QWIIC_LOGO_5MM  [QWIIC_5MM]  139.19,24.32 0 top
LOGO13  OSHW-LOGOS  [OSHW-LOGO-S]  29.08,42.93 0 bottom
LOGO14  QWIIC_LOGO_5MM  [QWIIC_5MM]  9.65,50.23 0 top
LOGO15  OSHW-LOGOS  [OSHW-LOGO-S]  54.99,42.93 0 bottom
LOGO16  QWIIC_LOGO_5MM  [QWIIC_5MM]  35.56,50.23 0 top
LOGO17  OSHW-LOGOS  [OSHW-LOGO-S]  80.9,42.93 0 bottom
LOGO18  QWIIC_LOGO_5MM  [QWIIC_5MM]  61.47,50.23 0 top
LOGO19  OSHW-LOGOS  [OSHW-LOGO-S]  106.81,42.93 0 bottom
LOGO20  QWIIC_LOGO_5MM  [QWIIC_5MM]  87.38,50.23 0 top
LOGO21  OSHW-LOGOS  [OSHW-LOGO-S]  132.72,42.93 0 bottom
LOGO22  QWIIC_LOGO_5MM  [QWIIC_5MM]  113.28,50.23 0 top
LOGO23  OSHW-LOGOS  [OSHW-LOGO-S]  158.62,42.93 0 bottom
LOGO24  QWIIC_LOGO_5MM  [QWIIC_5MM]  139.19,50.23 0 top
LOGO25  OSHW-LOGOS  [OSHW-LOGO-S]  29.08,68.83 0 bottom
LOGO26  QWIIC_LOGO_5MM  [QWIIC_5MM]  9.65,76.14 0 top
LOGO27  OSHW-LOGOS  [OSHW-LOGO-S]  54.99,68.83 0 bottom
LOGO28  QWIIC_LOGO_5MM  [QWIIC_5MM]  35.56,76.14 0 top
LOGO29  OSHW-LOGOS  [OSHW-LOGO-S]  80.9,68.83 0 bottom
LOGO30  QWIIC_LOGO_5MM  [QWIIC_5MM]  61.47,76.14 0 top
LOGO31  OSHW-LOGOS  [OSHW-LOGO-S]  106.81,68.83 0 bottom
LOGO32  QWIIC_LOGO_5MM  [QWIIC_5MM]  87.38,76.14 0 top
LOGO33  OSHW-LOGOS  [OSHW-LOGO-S]  132.72,68.83 0 bottom
LOGO34  QWIIC_LOGO_5MM  [QWIIC_5MM]  113.28,76.14 0 top
LOGO35  OSHW-LOGOS  [OSHW-LOGO-S]  158.62,68.83 0 bottom
LOGO36  QWIIC_LOGO_5MM  [QWIIC_5MM]  139.19,76.14 0 top
LOGO37  OSHW-LOGOS  [OSHW-LOGO-S]  29.08,94.74 0 bottom
LOGO38  QWIIC_LOGO_5MM  [QWIIC_5MM]  9.65,102.04 0 top
LOGO39  OSHW-LOGOS  [OSHW-LOGO-S]  54.99,94.74 0 bottom
LOGO40  QWIIC_LOGO_5MM  [QWIIC_5MM]  35.56,102.04 0 top
LOGO41  OSHW-LOGOS  [OSHW-LOGO-S]  80.9,94.74 0 bottom
LOGO42  QWIIC_LOGO_5MM  [QWIIC_5MM]  61.47,102.04 0 top
LOGO43  OSHW-LOGOS  [OSHW-LOGO-S]  106.81,94.74 0 bottom
LOGO44  QWIIC_LOGO_5MM  [QWIIC_5MM]  87.38,102.04 0 top
LOGO45  OSHW-LOGOS  [OSHW-LOGO-S]  132.72,94.74 0 bottom
LOGO46  QWIIC_LOGO_5MM  [QWIIC_5MM]  113.28,102.04 0 top
LOGO47  OSHW-LOGOS  [OSHW-LOGO-S]  158.62,94.74 0 bottom
LOGO48  QWIIC_LOGO_5MM  [QWIIC_5MM]  139.19,102.04 0 top
R1  4.7k  [0603]  28.57,24.64 90 top
R2  4.7k  [0603]  27.05,24.64 90 top
R3  1k  [0603]  12.83,14.48 0 top
R4  10k  [0603]  19.56,17.4 180 top
R5  3.3k  [0603]  19.56,15.88 180 top
R6  1k  [0603]  19.56,14.35 180 top
R7  1k  [0603]  38.73,14.48 0 top
R8  4.7k  [0603]  54.48,24.64 90 top
R9  4.7k  [0603]  52.96,24.64 90 top
R10  10k  [0603]  45.47,17.4 180 top
R11  3.3k  [0603]  45.47,15.88 180 top
R12  1k  [0603]  45.47,14.35 180 top
R13  1k  [0603]  64.64,14.48 0 top
R14  4.7k  [0603]  80.39,24.64 90 top
R15  4.7k  [0603]  78.87,24.64 90 top
R16  10k  [0603]  71.37,17.4 180 top
R17  3.3k  [0603]  71.37,15.88 180 top
R18  1k  [0603]  71.37,14.35 180 top
R19  1k  [0603]  90.55,14.48 0 top
R20  4.7k  [0603]  106.3,24.64 90 top
R21  4.7k  [0603]  104.78,24.64 90 top
R22  10k  [0603]  97.28,17.4 180 top
R23  3.3k  [0603]  97.28,15.88 180 top
R24  1k  [0603]  97.28,14.35 180 top
R25  1k  [0603]  116.46,14.48 0 top
R26  4.7k  [0603]  132.21,24.64 90 top
R27  4.7k  [0603]  130.68,24.64 90 top
R28  10k  [0603]  123.19,17.4 180 top
R29  3.3k  [0603]  123.19,15.88 180 top
R30  1k  [0603]  123.19,14.35 180 top
R31  1k  [0603]  142.37,14.48 0 top
R32  4.7k  [0603]  158.12,24.64 90 top
R33  4.7k  [0603]  156.59,24.64 90 top
R34  10k  [0603]  149.1,17.4 180 top
R35  3.3k  [0603]  149.1,15.88 180 top
R36  1k  [0603]  149.1,14.35 180 top
R37  1k  [0603]  12.83,40.39 0 top
R38  4.7k  [0603]  28.57,50.55 90 top
R39  4.7k  [0603]  27.05,50.55 90 top
R40  10k  [0603]  19.56,43.31 180 top
R41  3.3k  [0603]  19.56,41.78 180 top
R42  1k  [0603]  19.56,40.26 180 top
R43  1k  [0603]  38.73,40.39 0 top
R44  4.7k  [0603]  54.48,50.55 90 top
R45  4.7k  [0603]  52.96,50.55 90 top
R46  10k  [0603]  45.47,43.31 180 top
R47  3.3k  [0603]  45.47,41.78 180 top
R48  1k  [0603]  45.47,40.26 180 top
R49  1k  [0603]  64.64,40.39 0 top
R50  4.7k  [0603]  80.39,50.55 90 top
R51  4.7k  [0603]  78.87,50.55 90 top
R52  10k  [0603]  71.37,43.31 180 top
R53  3.3k  [0603]  71.37,41.78 180 top
R54  1k  [0603]  71.37,40.26 180 top
R55  1k  [0603]  90.55,40.39 0 top
R56  4.7k  [0603]  106.3,50.55 90 top
R57  4.7k  [0603]  104.78,50.55 90 top
R58  10k  [0603]  97.28,43.31 180 top
R59  3.3k  [0603]  97.28,41.78 180 top
R60  1k  [0603]  97.28,40.26 180 top
R61  1k  [0603]  116.46,40.39 0 top
R62  4.7k  [0603]  132.21,50.55 90 top
R63  4.7k  [0603]  130.68,50.55 90 top
R64  10k  [0603]  123.19,43.31 180 top
R65  3.3k  [0603]  123.19,41.78 180 top
R66  1k  [0603]  123.19,40.26 180 top
R67  1k  [0603]  142.37,40.39 0 top
R68  4.7k  [0603]  158.12,50.55 90 top
R69  4.7k  [0603]  156.59,50.55 90 top
R70  10k  [0603]  149.1,43.31 180 top
R71  3.3k  [0603]  149.1,41.78 180 top
R72  1k  [0603]  149.1,40.26 180 top
R73  1k  [0603]  12.83,66.29 0 top
R74  4.7k  [0603]  28.57,76.45 90 top
R75  4.7k  [0603]  27.05,76.45 90 top
R76  10k  [0603]  19.56,69.22 180 top
R77  3.3k  [0603]  19.56,67.69 180 top
R78  1k  [0603]  19.56,66.17 180 top
R79  1k  [0603]  38.73,66.29 0 top
R80  4.7k  [0603]  54.48,76.45 90 top
R81  4.7k  [0603]  52.96,76.45 90 top
R82  10k  [0603]  45.47,69.22 180 top
R83  3.3k  [0603]  45.47,67.69 180 top
R84  1k  [0603]  45.47,66.17 180 top
R85  1k  [0603]  64.64,66.29 0 top
R86  4.7k  [0603]  80.39,76.45 90 top
R87  4.7k  [0603]  78.87,76.45 90 top
R88  10k  [0603]  71.37,69.22 180 top
R89  3.3k  [0603]  71.37,67.69 180 top
R90  1k  [0603]  71.37,66.17 180 top
R91  1k  [0603]  90.55,66.29 0 top
R92  4.7k  [0603]  106.3,76.45 90 top
R93  4.7k  [0603]  104.78,76.45 90 top
R94  10k  [0603]  97.28,69.22 180 top
R95  3.3k  [0603]  97.28,67.69 180 top
R96  1k  [0603]  97.28,66.17 180 top
R97  1k  [0603]  116.46,66.29 0 top
R98  4.7k  [0603]  132.21,76.45 90 top
R99  4.7k  [0603]  130.68,76.45 90 top
R100  10k  [0603]  123.19,69.22 180 top
R101  3.3k  [0603]  123.19,67.69 180 top
R102  1k  [0603]  123.19,66.17 180 top
R103  1k  [0603]  142.37,66.29 0 top
R104  4.7k  [0603]  158.12,76.45 90 top
R105  4.7k  [0603]  156.59,76.45 90 top
R106  10k  [0603]  149.1,69.22 180 top
R107  3.3k  [0603]  149.1,67.69 180 top
R108  1k  [0603]  149.1,66.17 180 top
R109  1k  [0603]  12.83,92.2 0 top
R110  4.7k  [0603]  28.57,102.36 90 top
R111  4.7k  [0603]  27.05,102.36 90 top
R112  10k  [0603]  19.56,95.12 180 top
R113  3.3k  [0603]  19.56,93.6 180 top
R114  1k  [0603]  19.56,92.08 180 top
R115  1k  [0603]  38.73,92.2 0 top
R116  4.7k  [0603]  54.48,102.36 90 top
R117  4.7k  [0603]  52.96,102.36 90 top
R118  10k  [0603]  45.47,95.12 180 top
R119  3.3k  [0603]  45.47,93.6 180 top
R120  1k  [0603]  45.47,92.08 180 top
R121  1k  [0603]  64.64,92.2 0 top
R122  4.7k  [0603]  80.39,102.36 90 top
R123  4.7k  [0603]  78.87,102.36 90 top
R124  10k  [0603]  71.37,95.12 180 top
R125  3.3k  [0603]  71.37,93.6 180 top
R126  1k  [0603]  71.37,92.08 180 top
R127  1k  [0603]  90.55,92.2 0 top
R128  4.7k  [0603]  106.3,102.36 90 top
R129  4.7k  [0603]  104.78,102.36 90 top
R130  10k  [0603]  97.28,95.12 180 top
R131  3.3k  [0603]  97.28,93.6 180 top
R132  1k  [0603]  97.28,92.08 180 top
R133  1k  [0603]  116.46,92.2 0 top
R134  4.7k  [0603]  132.21,102.36 90 top
R135  4.7k  [0603]  130.68,102.36 90 top
R136  10k  [0603]  123.19,95.12 180 top
R137  3.3k  [0603]  123.19,93.6 180 top
R138  1k  [0603]  123.19,92.08 180 top
R139  1k  [0603]  142.37,92.2 0 top
R140  4.7k  [0603]  158.12,102.36 90 top
R141  4.7k  [0603]  156.59,102.36 90 top
R142  10k  [0603]  149.1,95.12 180 top
R143  3.3k  [0603]  149.1,93.6 180 top
R144  1k  [0603]  149.1,92.08 180 top
U1  STC31  [STC31]  19.56,22.73 0 top
U2  SHTC3  [SHTC3]  19.56,27.18 180 top
U3  SHTC3  [SHTC3]  45.47,27.18 180 top
U4  STC31  [STC31]  45.47,22.73 0 top
U5  SHTC3  [SHTC3]  71.37,27.18 180 top
U6  STC31  [STC31]  71.37,22.73 0 top
U7  SHTC3  [SHTC3]  97.28,27.18 180 top
U8  STC31  [STC31]  97.28,22.73 0 top
U9  SHTC3  [SHTC3]  123.19,27.18 180 top
U10  STC31  [STC31]  123.19,22.73 0 top
U11  SHTC3  [SHTC3]  149.1,27.18 180 top
U12  STC31  [STC31]  149.1,22.73 0 top
U13  SHTC3  [SHTC3]  19.56,53.09 180 top
U14  STC31  [STC31]  19.56,48.64 0 top
U15  SHTC3  [SHTC3]  45.47,53.09 180 top
U16  STC31  [STC31]  45.47,48.64 0 top
U17  SHTC3  [SHTC3]  71.37,53.09 180 top
U18  STC31  [STC31]  71.37,48.64 0 top
U19  SHTC3  [SHTC3]  97.28,53.09 180 top
U20  STC31  [STC31]  97.28,48.64 0 top
U21  SHTC3  [SHTC3]  123.19,53.09 180 top
U22  STC31  [STC31]  123.19,48.64 0 top
U23  SHTC3  [SHTC3]  149.1,53.09 180 top
U24  STC31  [STC31]  149.1,48.64 0 top
U25  SHTC3  [SHTC3]  19.56,78.99 180 top
U26  STC31  [STC31]  19.56,74.55 0 top
U27  SHTC3  [SHTC3]  45.47,78.99 180 top
U28  STC31  [STC31]  45.47,74.55 0 top
U29  SHTC3  [SHTC3]  71.37,78.99 180 top
U30  STC31  [STC31]  71.37,74.55 0 top
U31  SHTC3  [SHTC3]  97.28,78.99 180 top
U32  STC31  [STC31]  97.28,74.55 0 top
U33  SHTC3  [SHTC3]  123.19,78.99 180 top
U34  STC31  [STC31]  123.19,74.55 0 top
U35  SHTC3  [SHTC3]  149.1,78.99 180 top
U36  STC31  [STC31]  149.1,74.55 0 top
U37  SHTC3  [SHTC3]  19.56,104.9 180 top
U38  STC31  [STC31]  19.56,100.46 0 top
U39  SHTC3  [SHTC3]  45.47,104.9 180 top
U40  STC31  [STC31]  45.47,100.46 0 top
U41  SHTC3  [SHTC3]  71.37,104.9 180 top
U42  STC31  [STC31]  71.37,100.46 0 top
U43  SHTC3  [SHTC3]  97.28,104.9 180 top
U44  STC31  [STC31]  97.28,100.46 0 top
U45  SHTC3  [SHTC3]  123.19,104.9 180 top
U46  STC31  [STC31]  123.19,100.46 0 top
U47  SHTC3  [SHTC3]  149.1,104.9 180 top
U48  STC31  [STC31]  149.1,100.46 0 top
U$1  [#GND#0]  15.75,10.92 90 bottom
U$2  [#3#3V#0]  18.29,11.05 90 bottom
U$3  [#SDA#0]  20.83,10.92 90 bottom
U$4  [#SCL#0]  23.37,10.79 90 bottom
U$5  [#LED#0]  9.59,14.48 0 bottom
U$6  [#0X2A#0]  23.62,19.56 0 bottom
U$7  [#0X2B#0]  23.62,17.02 0 bottom
U$8  [#0X2C#0]  23.62,14.48 0 bottom
U$9  [#I�C#0]  27.81,22.73 0 bottom
U$10  SPARKX-LOGO3  [SPARKX-SMALL]  27.88,14.48 0 top
U$11  [STC310]  11.05,23.37 0 bottom
U$12  [#0]  11.05,22.1 0 bottom
U$13  [SHTC30]  11.05,20.83 0 bottom
U$14  [CO0]  11.56,19.56 0 bottom
U$15  [20]  9.97,19.24 0 bottom
U$16  [SENSOR0]  11.05,18.29 0 bottom
U$17  SPARKX-LOGO3  [SPARKX-SMALL]  53.78,14.48 0 top
U$18  SPARKX-LOGO3  [SPARKX-SMALL]  11.05,25.27 0 bottom
U$19  SPARKX-LOGO3  [SPARKX-SMALL]  36.96,25.27 0 bottom
U$20  [#PWR#0]  35.37,13.08 0 top
U$21  [#GND#0]  41.66,10.92 90 top
U$22  [#3#3V#0]  44.2,11.05 90 top
U$23  [#SDA#0]  46.74,10.92 90 top
U$24  [#SCL#0]  49.28,10.79 90 top
U$25  [#GND#0]  41.66,10.92 90 bottom
U$26  [#3#3V#0]  44.2,11.05 90 bottom
U$27  [#SDA#0]  46.74,10.92 90 bottom
U$28  [#SCL#0]  49.28,10.79 90 bottom
U$29  [#LED#0]  35.5,14.48 0 bottom
U$30  [#0X2A#0]  49.53,19.56 0 bottom
U$31  [#0X2B#0]  49.53,17.02 0 bottom
U$32  [#PWR#0]  9.46,13.08 0 top
U$33  [#GND#0]  15.75,10.92 90 top
U$34  [#3#3V#0]  18.29,11.05 90 top
U$35  [#SDA#0]  20.83,10.92 90 top
U$36  [#SCL#0]  23.37,10.79 90 top
U$37  [#0X2C#0]  49.53,14.48 0 bottom
U$38  [#I�C#0]  53.72,22.73 0 bottom
U$39  [STC310]  36.96,23.37 0 bottom
U$40  [#0]  36.96,22.1 0 bottom
U$41  [SHTC30]  36.96,20.83 0 bottom
U$42  [CO0]  37.46,19.56 0 bottom
U$43  [20]  35.88,19.24 0 bottom
U$44  [SENSOR0]  36.96,18.29 0 bottom
U$45  SPARKX-LOGO3  [SPARKX-SMALL]  79.69,14.48 0 top
U$46  SPARKX-LOGO3  [SPARKX-SMALL]  62.86,25.27 0 bottom
U$47  [#PWR#0]  61.28,13.08 0 top
U$48  [#GND#0]  67.56,10.92 90 top
U$49  [#3#3V#0]  70.1,11.05 90 top
U$50  [#SDA#0]  72.64,10.92 90 top
U$51  [#SCL#0]  75.18,10.79 90 top
U$52  [#GND#0]  67.56,10.92 90 bottom
U$53  [#3#3V#0]  70.1,11.05 90 bottom
U$54  [#SDA#0]  72.64,10.92 90 bottom
U$55  [#SCL#0]  75.18,10.79 90 bottom
U$56  [#LED#0]  61.4,14.48 0 bottom
U$57  [#0X2A#0]  75.44,19.56 0 bottom
U$58  [#0X2B#0]  75.44,17.02 0 bottom
U$59  [#0X2C#0]  75.44,14.48 0 bottom
U$60  [#I�C#0]  79.63,22.73 0 bottom
U$61  [STC310]  62.86,23.37 0 bottom
U$62  [#0]  62.86,22.1 0 bottom
U$63  [SHTC30]  62.86,20.83 0 bottom
U$64  [CO0]  63.37,19.56 0 bottom
U$65  [20]  61.79,19.24 0 bottom
U$66  [SENSOR0]  62.86,18.29 0 bottom
U$67  SPARKX-LOGO3  [SPARKX-SMALL]  105.6,14.48 0 top
U$68  SPARKX-LOGO3  [SPARKX-SMALL]  88.77,25.27 0 bottom
U$69  [#PWR#0]  87.19,13.08 0 top
U$70  [#GND#0]  93.47,10.92 90 top
U$71  [#3#3V#0]  96.01,11.05 90 top
U$72  [#SDA#0]  98.55,10.92 90 top
U$73  [#SCL#0]  101.09,10.79 90 top
U$74  [#GND#0]  93.47,10.92 90 bottom
U$75  [#3#3V#0]  96.01,11.05 90 bottom
U$76  [#SDA#0]  98.55,10.92 90 bottom
U$77  [#SCL#0]  101.09,10.79 90 bottom
U$78  [#LED#0]  87.31,14.48 0 bottom
U$79  [#0X2A#0]  101.35,19.56 0 bottom
U$80  [#0X2B#0]  101.35,17.02 0 bottom
U$81  [#0X2C#0]  101.35,14.48 0 bottom
U$82  [#I�C#0]  105.54,22.73 0 bottom
U$83  [STC310]  88.77,23.37 0 bottom
U$84  [#0]  88.77,22.1 0 bottom
U$85  [SHTC30]  88.77,20.83 0 bottom
U$86  [CO0]  89.28,19.56 0 bottom
U$87  [20]  87.69,19.24 0 bottom
U$88  [SENSOR0]  88.77,18.29 0 bottom
U$89  SPARKX-LOGO3  [SPARKX-SMALL]  131.51,14.48 0 top
U$90  SPARKX-LOGO3  [SPARKX-SMALL]  114.68,25.27 0 bottom
U$91  [#PWR#0]  113.09,13.08 0 top
U$92  [#GND#0]  119.38,10.92 90 top
U$93  [#3#3V#0]  121.92,11.05 90 top
U$94  [#SDA#0]  124.46,10.92 90 top
U$95  [#SCL#0]  127,10.79 90 top
U$96  [#GND#0]  119.38,10.92 90 bottom
U$97  [#3#3V#0]  121.92,11.05 90 bottom
U$98  [#SDA#0]  124.46,10.92 90 bottom
U$99  [#SCL#0]  127,10.79 90 bottom
U$100  [#LED#0]  113.22,14.48 0 bottom
U$101  [#0X2A#0]  127.25,19.56 0 bottom
U$102  [#0X2B#0]  127.25,17.02 0 bottom
U$103  [#0X2C#0]  127.25,14.48 0 bottom
U$104  [#I�C#0]  131.44,22.73 0 bottom
U$105  [STC310]  114.68,23.37 0 bottom
U$106  [#0]  114.68,22.1 0 bottom
U$107  [SHTC30]  114.68,20.83 0 bottom
U$108  [CO0]  115.19,19.56 0 bottom
U$109  [20]  113.6,19.24 0 bottom
U$110  [SENSOR0]  114.68,18.29 0 bottom
U$111  SPARKX-LOGO3  [SPARKX-SMALL]  157.42,14.48 0 top
U$112  SPARKX-LOGO3  [SPARKX-SMALL]  140.59,25.27 0 bottom
U$113  [#PWR#0]  139,13.08 0 top
U$114  [#GND#0]  145.29,10.92 90 top
U$115  [#3#3V#0]  147.83,11.05 90 top
U$116  [#SDA#0]  150.37,10.92 90 top
U$117  [#SCL#0]  152.91,10.79 90 top
U$118  [#GND#0]  145.29,10.92 90 bottom
U$119  [#3#3V#0]  147.83,11.05 90 bottom
U$120  [#SDA#0]  150.37,10.92 90 bottom
U$121  [#SCL#0]  152.91,10.79 90 bottom
U$122  [#LED#0]  139.13,14.48 0 bottom
U$123  [#0X2A#0]  153.16,19.56 0 bottom
U$124  [#0X2B#0]  153.16,17.02 0 bottom
U$125  [#0X2C#0]  153.16,14.48 0 bottom
U$126  [#I�C#0]  157.35,22.73 0 bottom
U$127  [STC310]  140.59,23.37 0 bottom
U$128  [#0]  140.59,22.1 0 bottom
U$129  [SHTC30]  140.59,20.83 0 bottom
U$130  [CO0]  141.1,19.56 0 bottom
U$131  [20]  139.51,19.24 0 bottom
U$132  [SENSOR0]  140.59,18.29 0 bottom
U$133  SPARKX-LOGO3  [SPARKX-SMALL]  27.88,40.39 0 top
U$134  SPARKX-LOGO3  [SPARKX-SMALL]  11.05,51.18 0 bottom
U$135  [#PWR#0]  9.46,38.99 0 top
U$136  [#GND#0]  15.75,36.83 90 top
U$137  [#3#3V#0]  18.29,36.96 90 top
U$138  [#SDA#0]  20.83,36.83 90 top
U$139  [#SCL#0]  23.37,36.7 90 top
U$140  [#GND#0]  15.75,36.83 90 bottom
U$141  [#3#3V#0]  18.29,36.96 90 bottom
U$142  [#SDA#0]  20.83,36.83 90 bottom
U$143  [#SCL#0]  23.37,36.7 90 bottom
U$144  [#LED#0]  9.59,40.39 0 bottom
U$145  [#0X2A#0]  23.62,45.47 0 bottom
U$146  [#0X2B#0]  23.62,42.93 0 bottom
U$147  [#0X2C#0]  23.62,40.39 0 bottom
U$148  [#I�C#0]  27.81,48.64 0 bottom
U$149  [STC310]  11.05,49.28 0 bottom
U$150  [#0]  11.05,48.01 0 bottom
U$151  [SHTC30]  11.05,46.74 0 bottom
U$152  [CO0]  11.56,45.47 0 bottom
U$153  [20]  9.97,45.15 0 bottom
U$154  [SENSOR0]  11.05,44.2 0 bottom
U$155  SPARKX-LOGO3  [SPARKX-SMALL]  53.78,40.39 0 top
U$156  SPARKX-LOGO3  [SPARKX-SMALL]  36.96,51.18 0 bottom
U$157  [#PWR#0]  35.37,38.99 0 top
U$158  [#GND#0]  41.66,36.83 90 top
U$159  [#3#3V#0]  44.2,36.96 90 top
U$160  [#SDA#0]  46.74,36.83 90 top
U$161  [#SCL#0]  49.28,36.7 90 top
U$162  [#GND#0]  41.66,36.83 90 bottom
U$163  [#3#3V#0]  44.2,36.96 90 bottom
U$164  [#SDA#0]  46.74,36.83 90 bottom
U$165  [#SCL#0]  49.28,36.7 90 bottom
U$166  [#LED#0]  35.5,40.39 0 bottom
U$167  [#0X2A#0]  49.53,45.47 0 bottom
U$168  [#0X2B#0]  49.53,42.93 0 bottom
U$169  [#0X2C#0]  49.53,40.39 0 bottom
U$170  [#I�C#0]  53.72,48.64 0 bottom
U$171  [STC310]  36.96,49.28 0 bottom
U$172  [#0]  36.96,48.01 0 bottom
U$173  [SHTC30]  36.96,46.74 0 bottom
U$174  [CO0]  37.46,45.47 0 bottom
U$175  [20]  35.88,45.15 0 bottom
U$176  [SENSOR0]  36.96,44.2 0 bottom
U$177  SPARKX-LOGO3  [SPARKX-SMALL]  79.69,40.39 0 top
U$178  SPARKX-LOGO3  [SPARKX-SMALL]  62.86,51.18 0 bottom
U$179  [#PWR#0]  61.28,38.99 0 top
U$180  [#GND#0]  67.56,36.83 90 top
U$181  [#3#3V#0]  70.1,36.96 90 top
U$182  [#SDA#0]  72.64,36.83 90 top
U$183  [#SCL#0]  75.18,36.7 90 top
U$184  [#GND#0]  67.56,36.83 90 bottom
U$185  [#3#3V#0]  70.1,36.96 90 bottom
U$186  [#SDA#0]  72.64,36.83 90 bottom
U$187  [#SCL#0]  75.18,36.7 90 bottom
U$188  [#LED#0]  61.4,40.39 0 bottom
U$189  [#0X2A#0]  75.44,45.47 0 bottom
U$190  [#0X2B#0]  75.44,42.93 0 bottom
U$191  [#0X2C#0]  75.44,40.39 0 bottom
U$192  [#I�C#0]  79.63,48.64 0 bottom
U$193  [STC310]  62.86,49.28 0 bottom
U$194  [#0]  62.86,48.01 0 bottom
U$195  [SHTC30]  62.86,46.74 0 bottom
U$196  [CO0]  63.37,45.47 0 bottom
U$197  [20]  61.79,45.15 0 bottom
U$198  [SENSOR0]  62.86,44.2 0 bottom
U$199  SPARKX-LOGO3  [SPARKX-SMALL]  105.6,40.39 0 top
U$200  SPARKX-LOGO3  [SPARKX-SMALL]  88.77,51.18 0 bottom
U$201  [#PWR#0]  87.19,38.99 0 top
U$202  [#GND#0]  93.47,36.83 90 top
U$203  [#3#3V#0]  96.01,36.96 90 top
U$204  [#SDA#0]  98.55,36.83 90 top
U$205  [#SCL#0]  101.09,36.7 90 top
U$206  [#GND#0]  93.47,36.83 90 bottom
U$207  [#3#3V#0]  96.01,36.96 90 bottom
U$208  [#SDA#0]  98.55,36.83 90 bottom
U$209  [#SCL#0]  101.09,36.7 90 bottom
U$210  [#LED#0]  87.31,40.39 0 bottom
U$211  [#0X2A#0]  101.35,45.47 0 bottom
U$212  [#0X2B#0]  101.35,42.93 0 bottom
U$213  [#0X2C#0]  101.35,40.39 0 bottom
U$214  [#I�C#0]  105.54,48.64 0 bottom
U$215  [STC310]  88.77,49.28 0 bottom
U$216  [#0]  88.77,48.01 0 bottom
U$217  [SHTC30]  88.77,46.74 0 bottom
U$218  [CO0]  89.28,45.47 0 bottom
U$219  [20]  87.69,45.15 0 bottom
U$220  [SENSOR0]  88.77,44.2 0 bottom
U$221  SPARKX-LOGO3  [SPARKX-SMALL]  131.51,40.39 0 top
U$222  SPARKX-LOGO3  [SPARKX-SMALL]  114.68,51.18 0 bottom
U$223  [#PWR#0]  113.09,38.99 0 top
U$224  [#GND#0]  119.38,36.83 90 top
U$225  [#3#3V#0]  121.92,36.96 90 top
U$226  [#SDA#0]  124.46,36.83 90 top
U$227  [#SCL#0]  127,36.7 90 top
U$228  [#GND#0]  119.38,36.83 90 bottom
U$229  [#3#3V#0]  121.92,36.96 90 bottom
U$230  [#SDA#0]  124.46,36.83 90 bottom
U$231  [#SCL#0]  127,36.7 90 bottom
U$232  [#LED#0]  113.22,40.39 0 bottom
U$233  [#0X2A#0]  127.25,45.47 0 bottom
U$234  [#0X2B#0]  127.25,42.93 0 bottom
U$235  [#0X2C#0]  127.25,40.39 0 bottom
U$236  [#I�C#0]  131.44,48.64 0 bottom
U$237  [STC310]  114.68,49.28 0 bottom
U$238  [#0]  114.68,48.01 0 bottom
U$239  [SHTC30]  114.68,46.74 0 bottom
U$240  [CO0]  115.19,45.47 0 bottom
U$241  [20]  113.6,45.15 0 bottom
U$242  [SENSOR0]  114.68,44.2 0 bottom
U$243  SPARKX-LOGO3  [SPARKX-SMALL]  157.42,40.39 0 top
U$244  SPARKX-LOGO3  [SPARKX-SMALL]  140.59,51.18 0 bottom
U$245  [#PWR#0]  139,38.99 0 top
U$246  [#GND#0]  145.29,36.83 90 top
U$247  [#3#3V#0]  147.83,36.96 90 top
U$248  [#SDA#0]  150.37,36.83 90 top
U$249  [#SCL#0]  152.91,36.7 90 top
U$250  [#GND#0]  145.29,36.83 90 bottom
U$251  [#3#3V#0]  147.83,36.96 90 bottom
U$252  [#SDA#0]  150.37,36.83 90 bottom
U$253  [#SCL#0]  152.91,36.7 90 bottom
U$254  [#LED#0]  139.13,40.39 0 bottom
U$255  [#0X2A#0]  153.16,45.47 0 bottom
U$256  [#0X2B#0]  153.16,42.93 0 bottom
U$257  [#0X2C#0]  153.16,40.39 0 bottom
U$258  [#I�C#0]  157.35,48.64 0 bottom
U$259  [STC310]  140.59,49.28 0 bottom
U$260  [#0]  140.59,48.01 0 bottom
U$261  [SHTC30]  140.59,46.74 0 bottom
U$262  [CO0]  141.1,45.47 0 bottom
U$263  [20]  139.51,45.15 0 bottom
U$264  [SENSOR0]  140.59,44.2 0 bottom
U$265  SPARKX-LOGO3  [SPARKX-SMALL]  27.88,66.29 0 top
U$266  SPARKX-LOGO3  [SPARKX-SMALL]  11.05,77.09 0 bottom
U$267  [#PWR#0]  9.46,64.9 0 top
U$268  [#GND#0]  15.75,62.74 90 top
U$269  [#3#3V#0]  18.29,62.86 90 top
U$270  [#SDA#0]  20.83,62.74 90 top
U$271  [#SCL#0]  23.37,62.61 90 top
U$272  [#GND#0]  15.75,62.74 90 bottom
U$273  [#3#3V#0]  18.29,62.86 90 bottom
U$274  [#SDA#0]  20.83,62.74 90 bottom
U$275  [#SCL#0]  23.37,62.61 90 bottom
U$276  [#LED#0]  9.59,66.29 0 bottom
U$277  [#0X2A#0]  23.62,71.37 0 bottom
U$278  [#0X2B#0]  23.62,68.83 0 bottom
U$279  [#0X2C#0]  23.62,66.29 0 bottom
U$280  [#I�C#0]  27.81,74.55 0 bottom
U$281  [STC310]  11.05,75.18 0 bottom
U$282  [#0]  11.05,73.91 0 bottom
U$283  [SHTC30]  11.05,72.64 0 bottom
U$284  [CO0]  11.56,71.37 0 bottom
U$285  [20]  9.97,71.06 0 bottom
U$286  [SENSOR0]  11.05,70.1 0 bottom